# Altium PCB Odrive.PcbDoc (part 1 of 4)
Units mil, origin at the board's own origin, x right, y up, seen from the top; angles counter-clockwise.
Board outline 2874.02 x 1968.5 mil, 4 copper layers (Top Layer, Power, Signal, Bottom Layer), stack 74.892 mil thick; 198 components, 162 nets, 717 pads, 948 vias.
Unrouted connection lines stored in the file: 81.
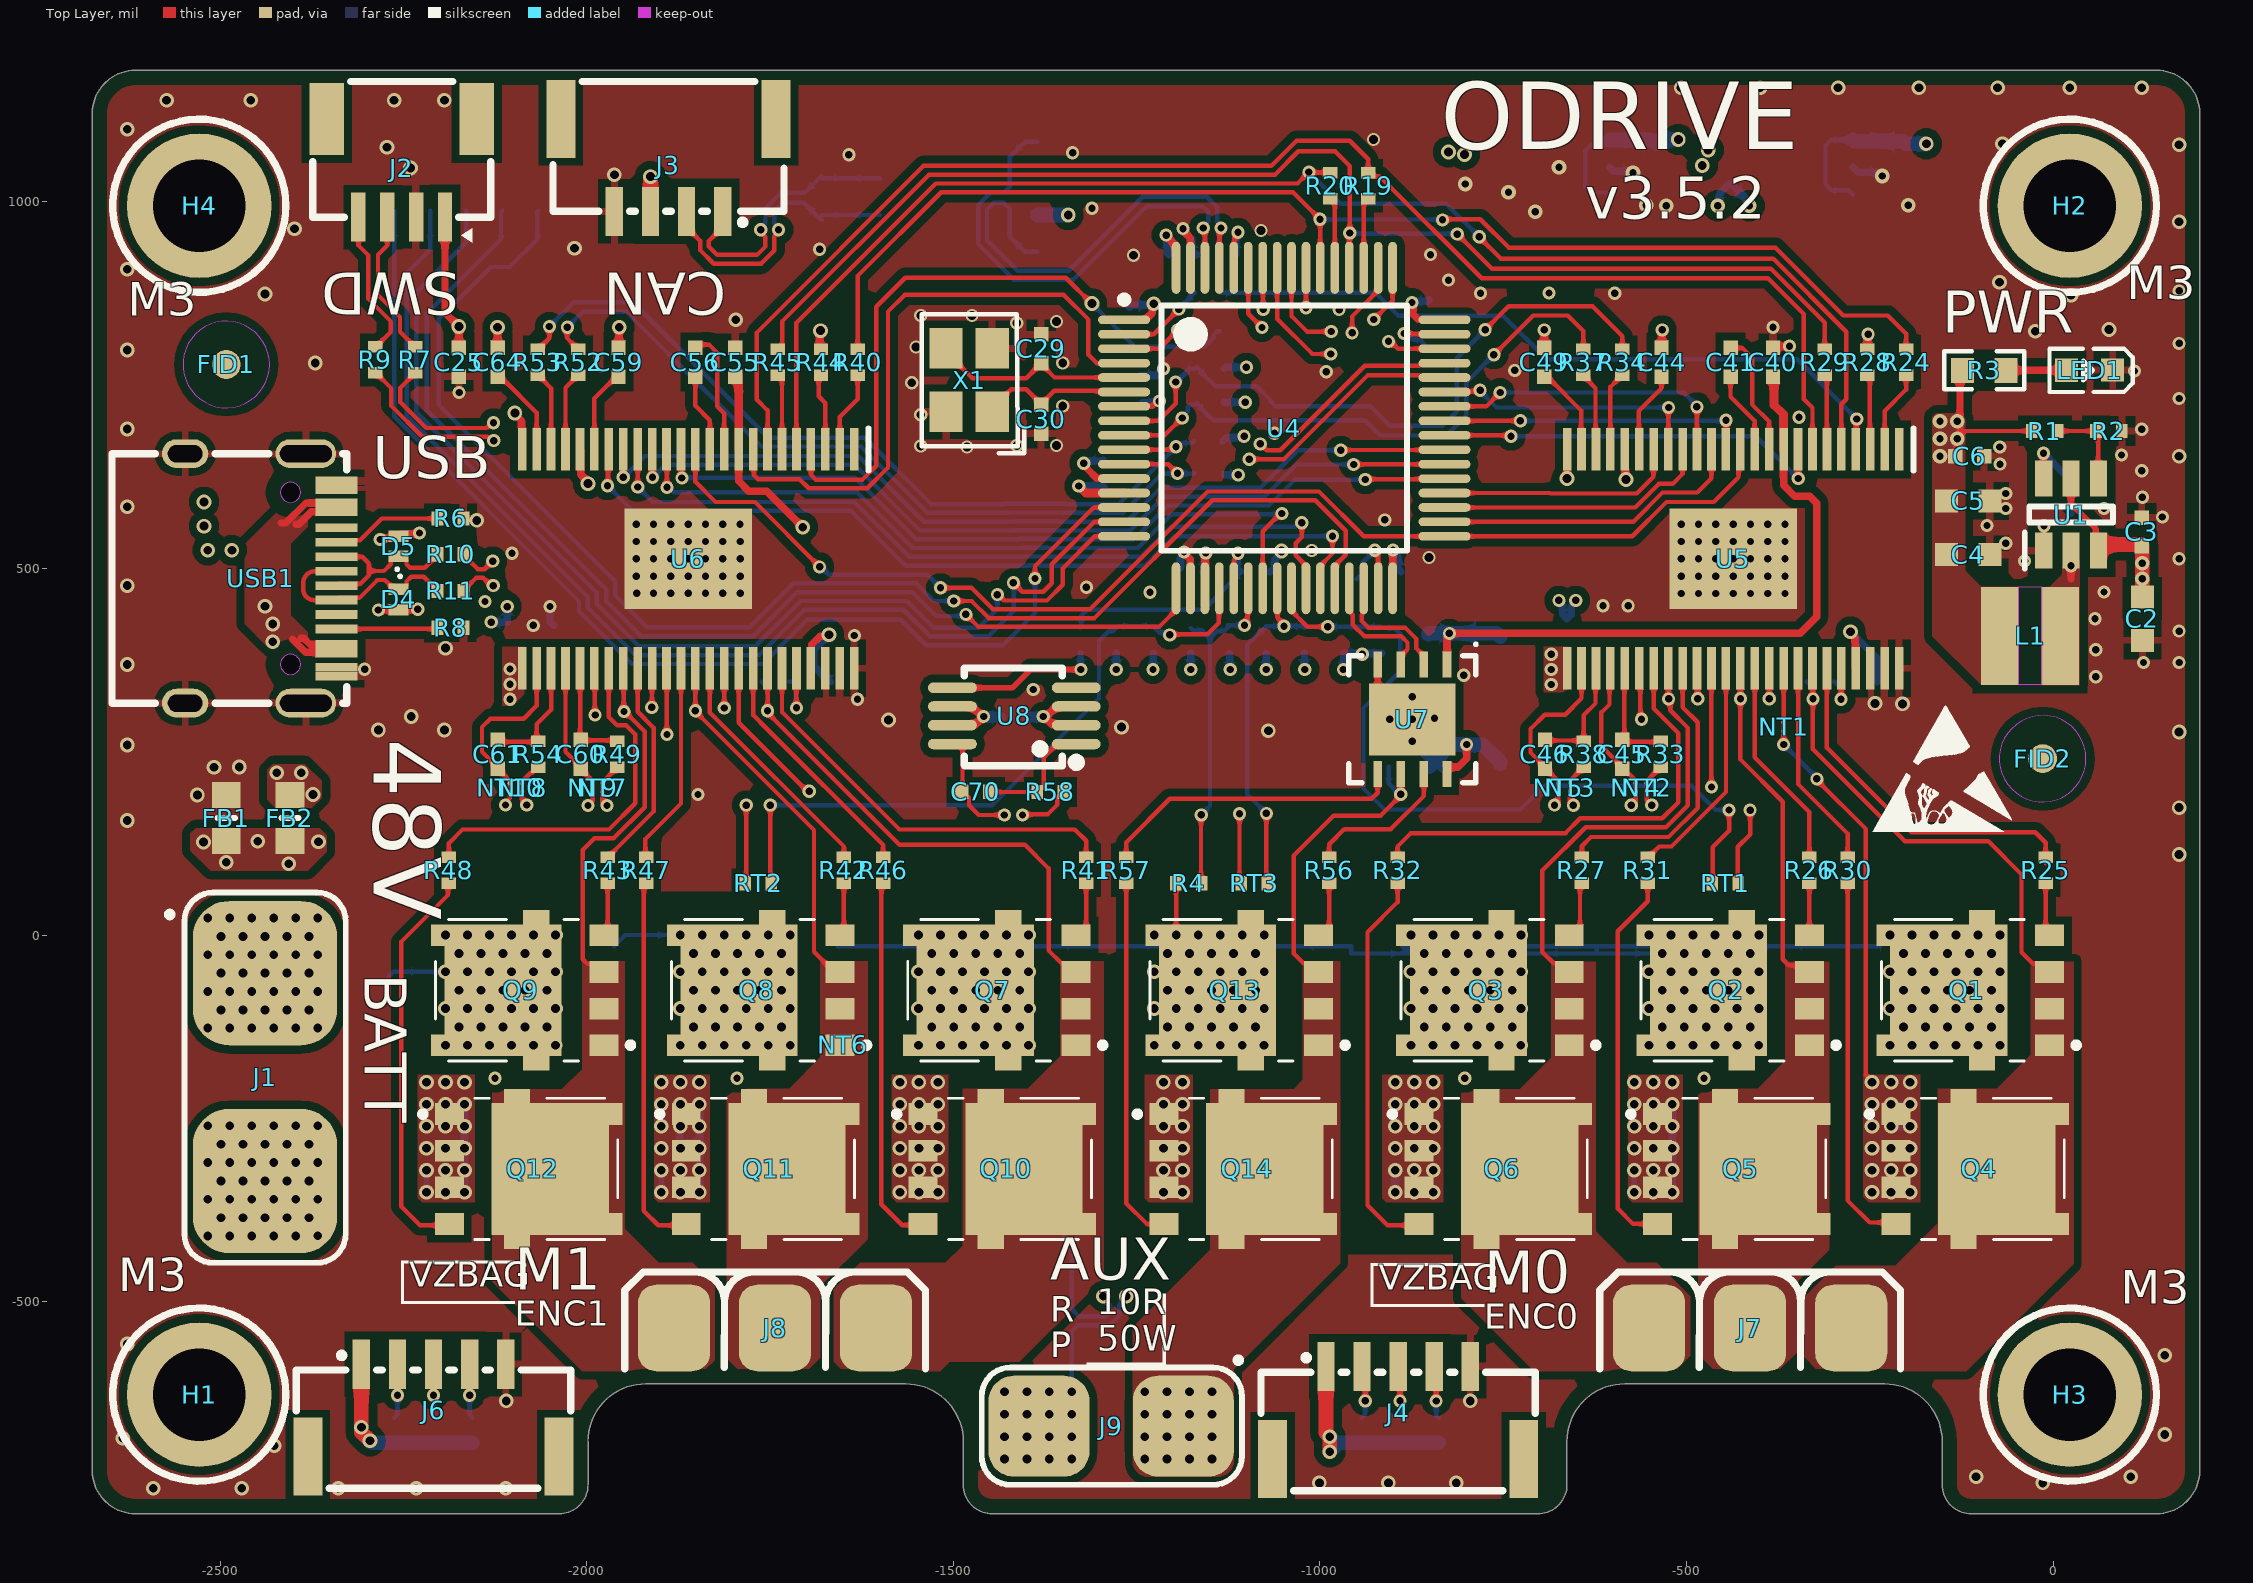
[diagram p0: Top Layer view]
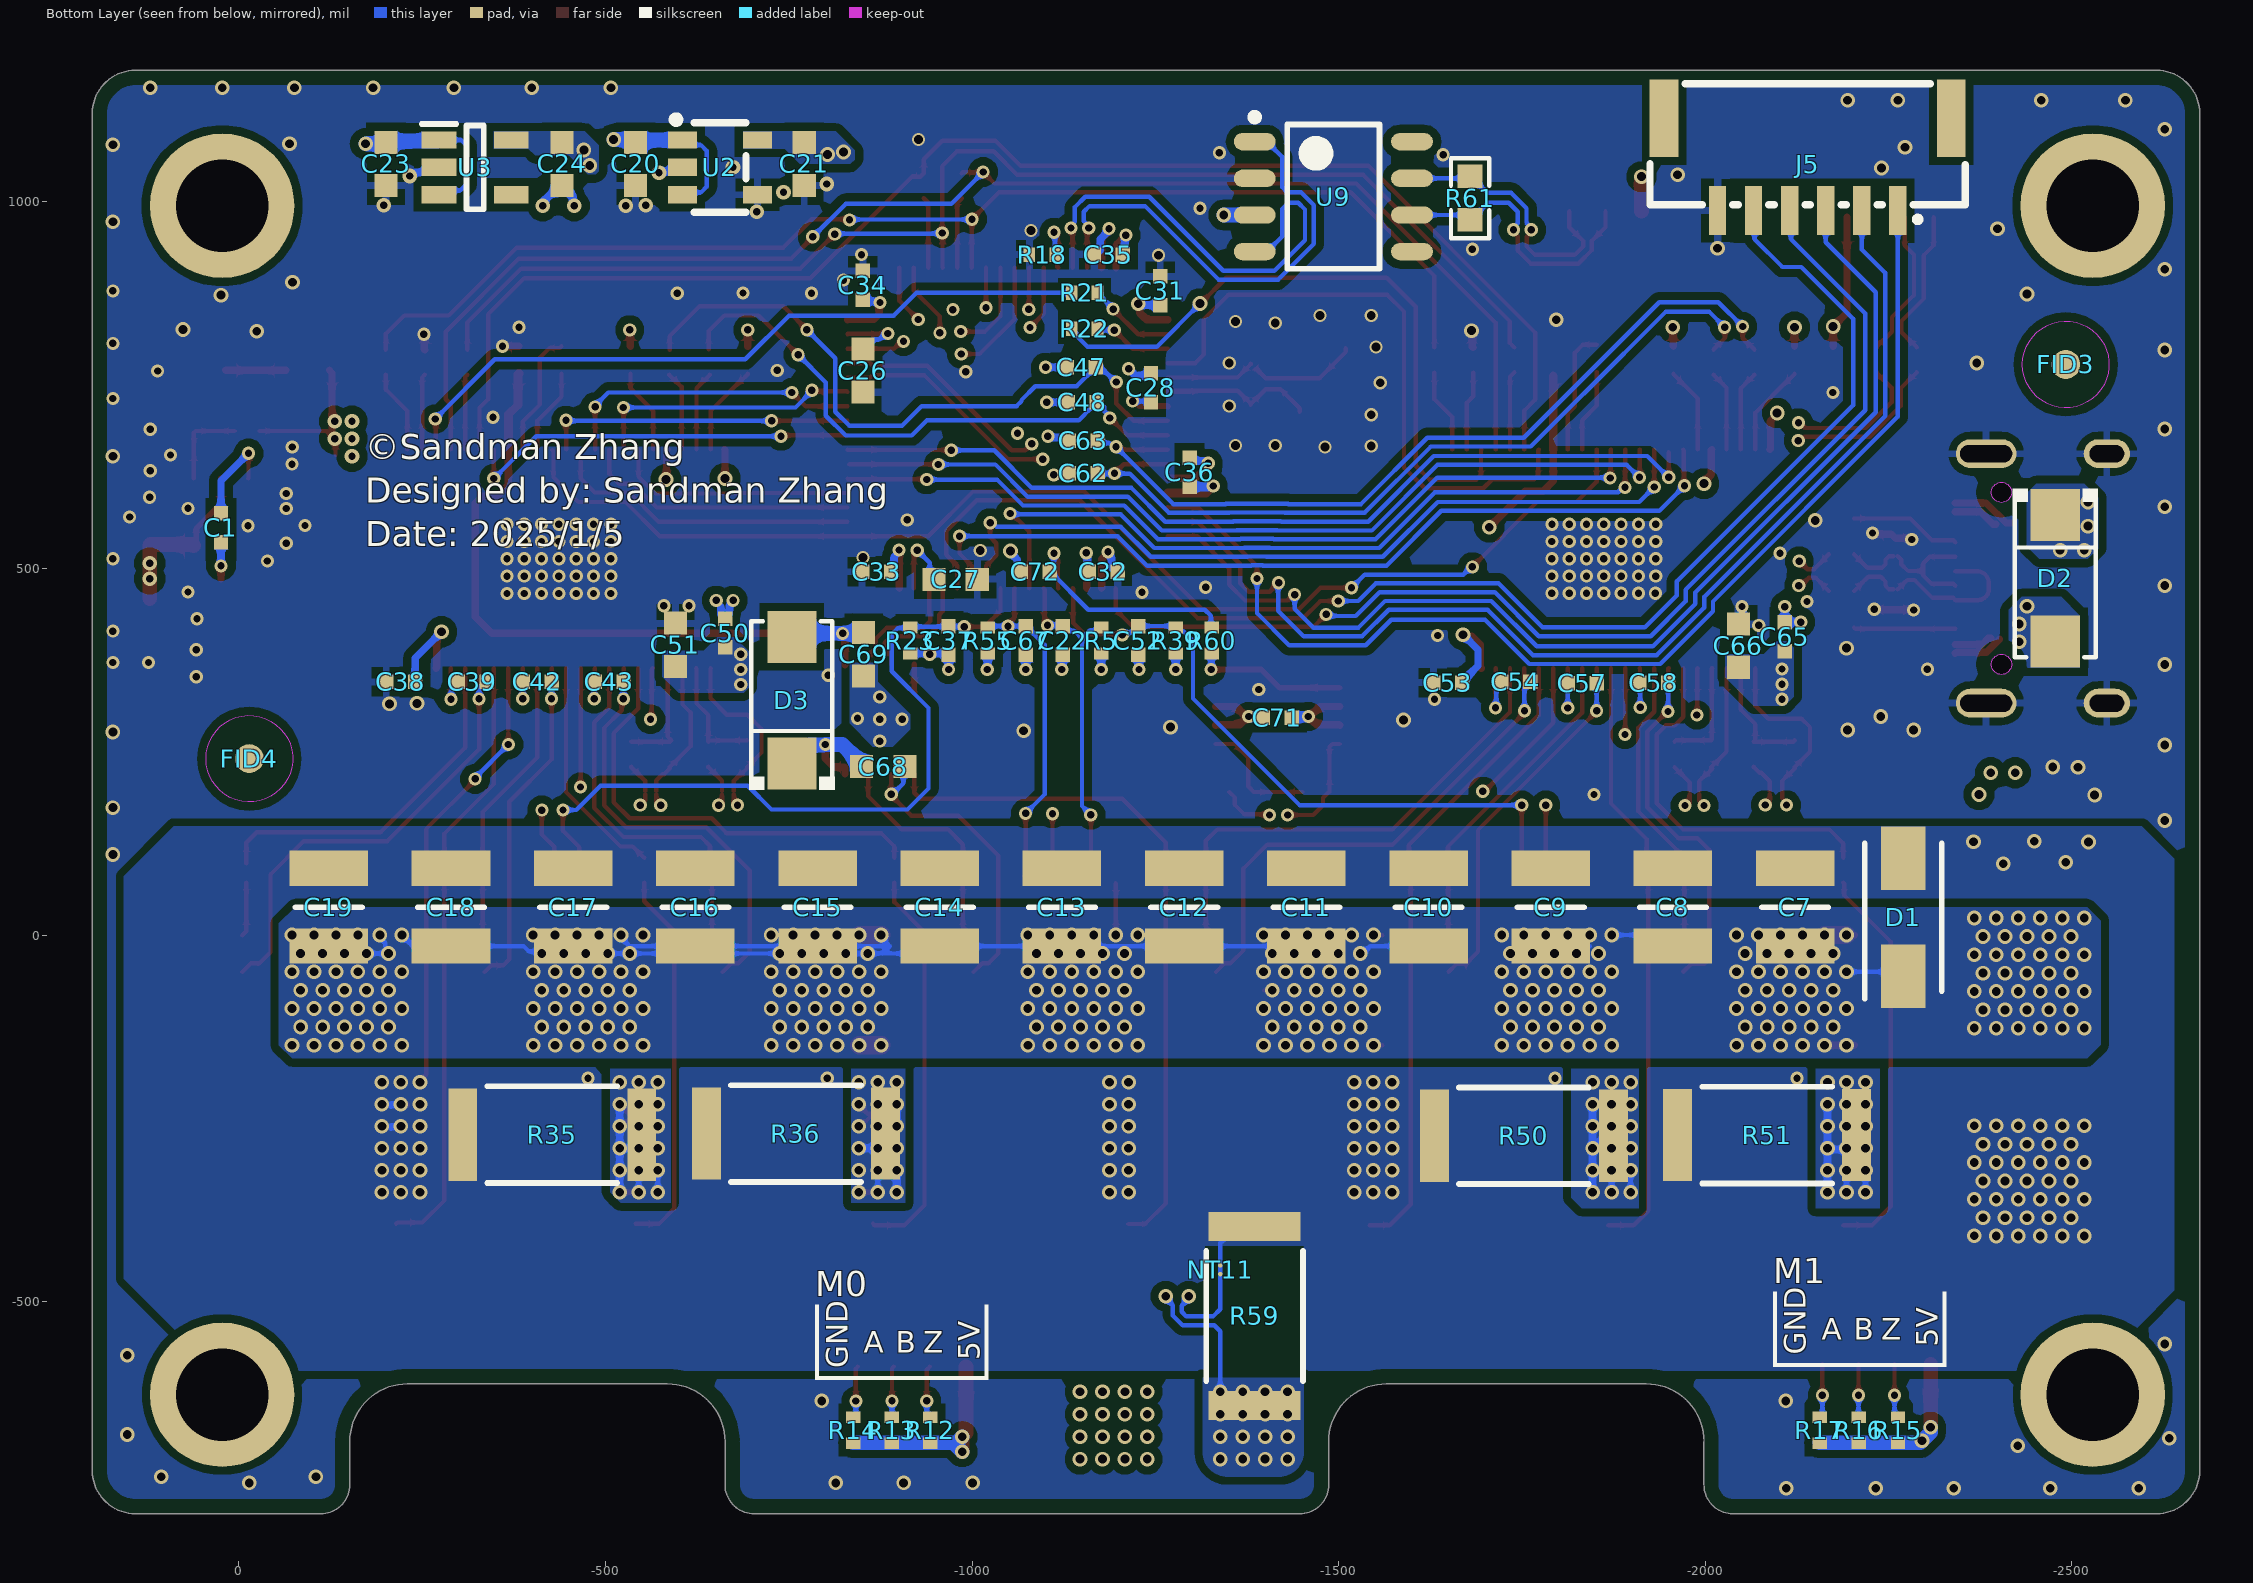
[diagram p1: Bottom Layer view, seen from below]
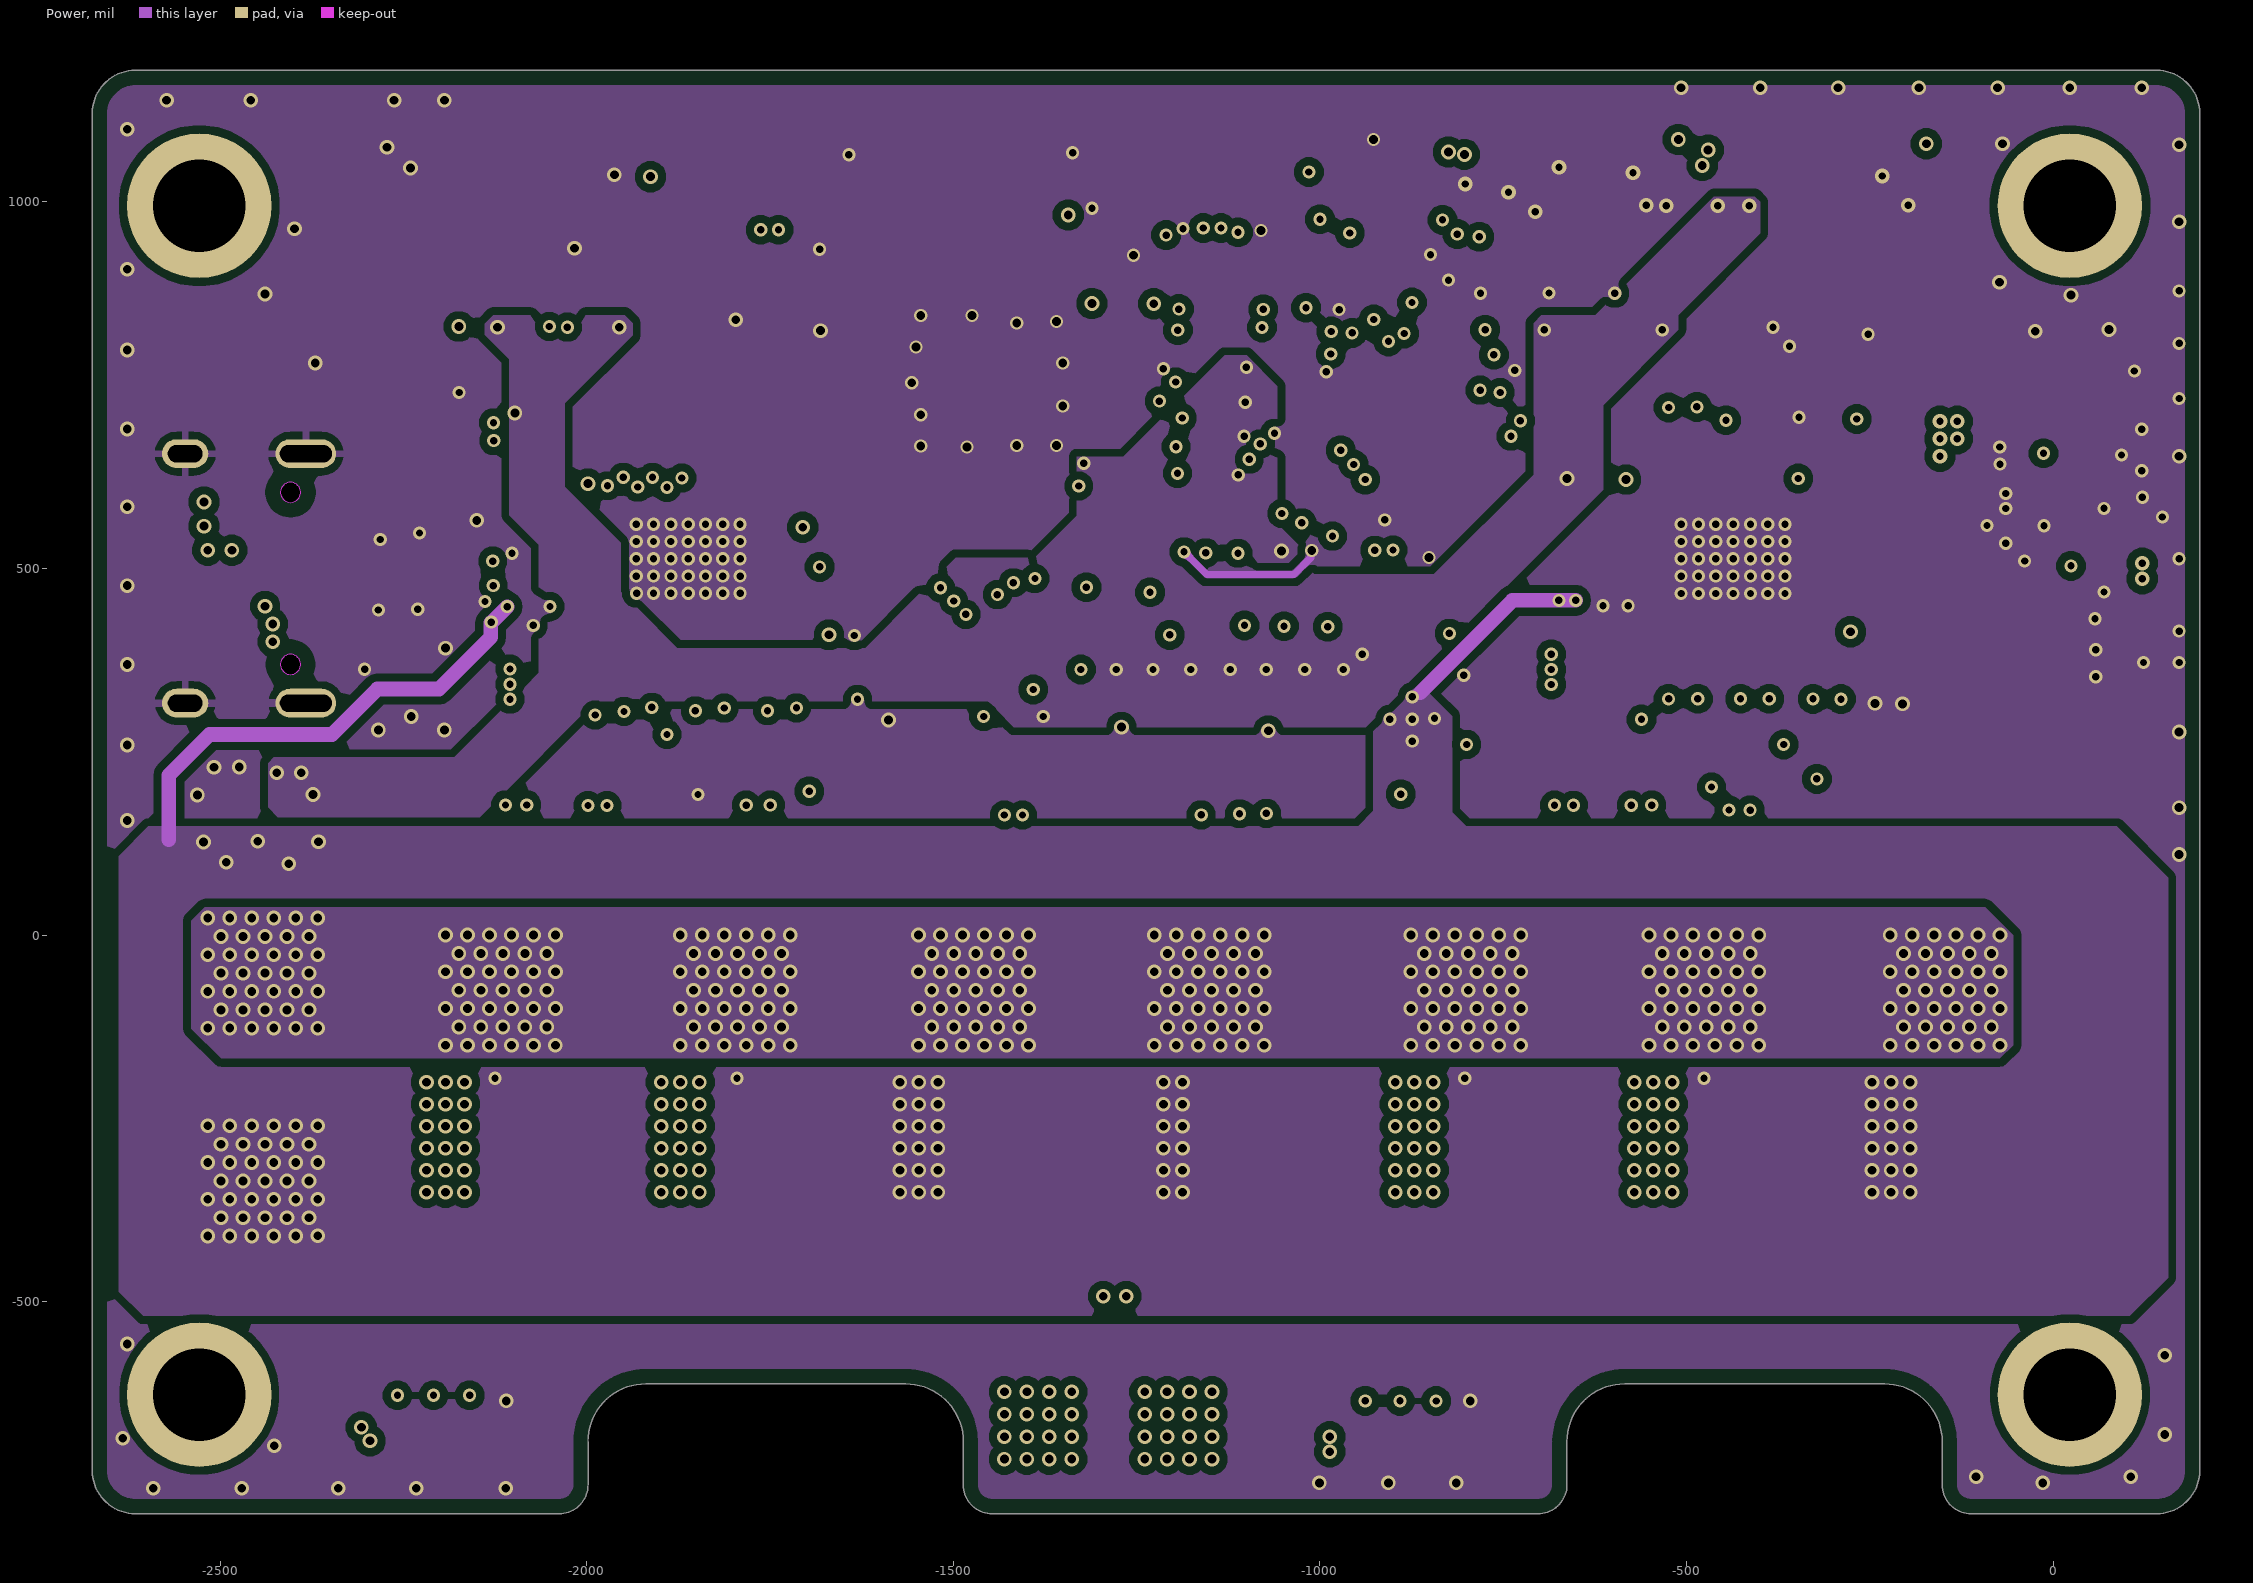
[diagram p2: Power]
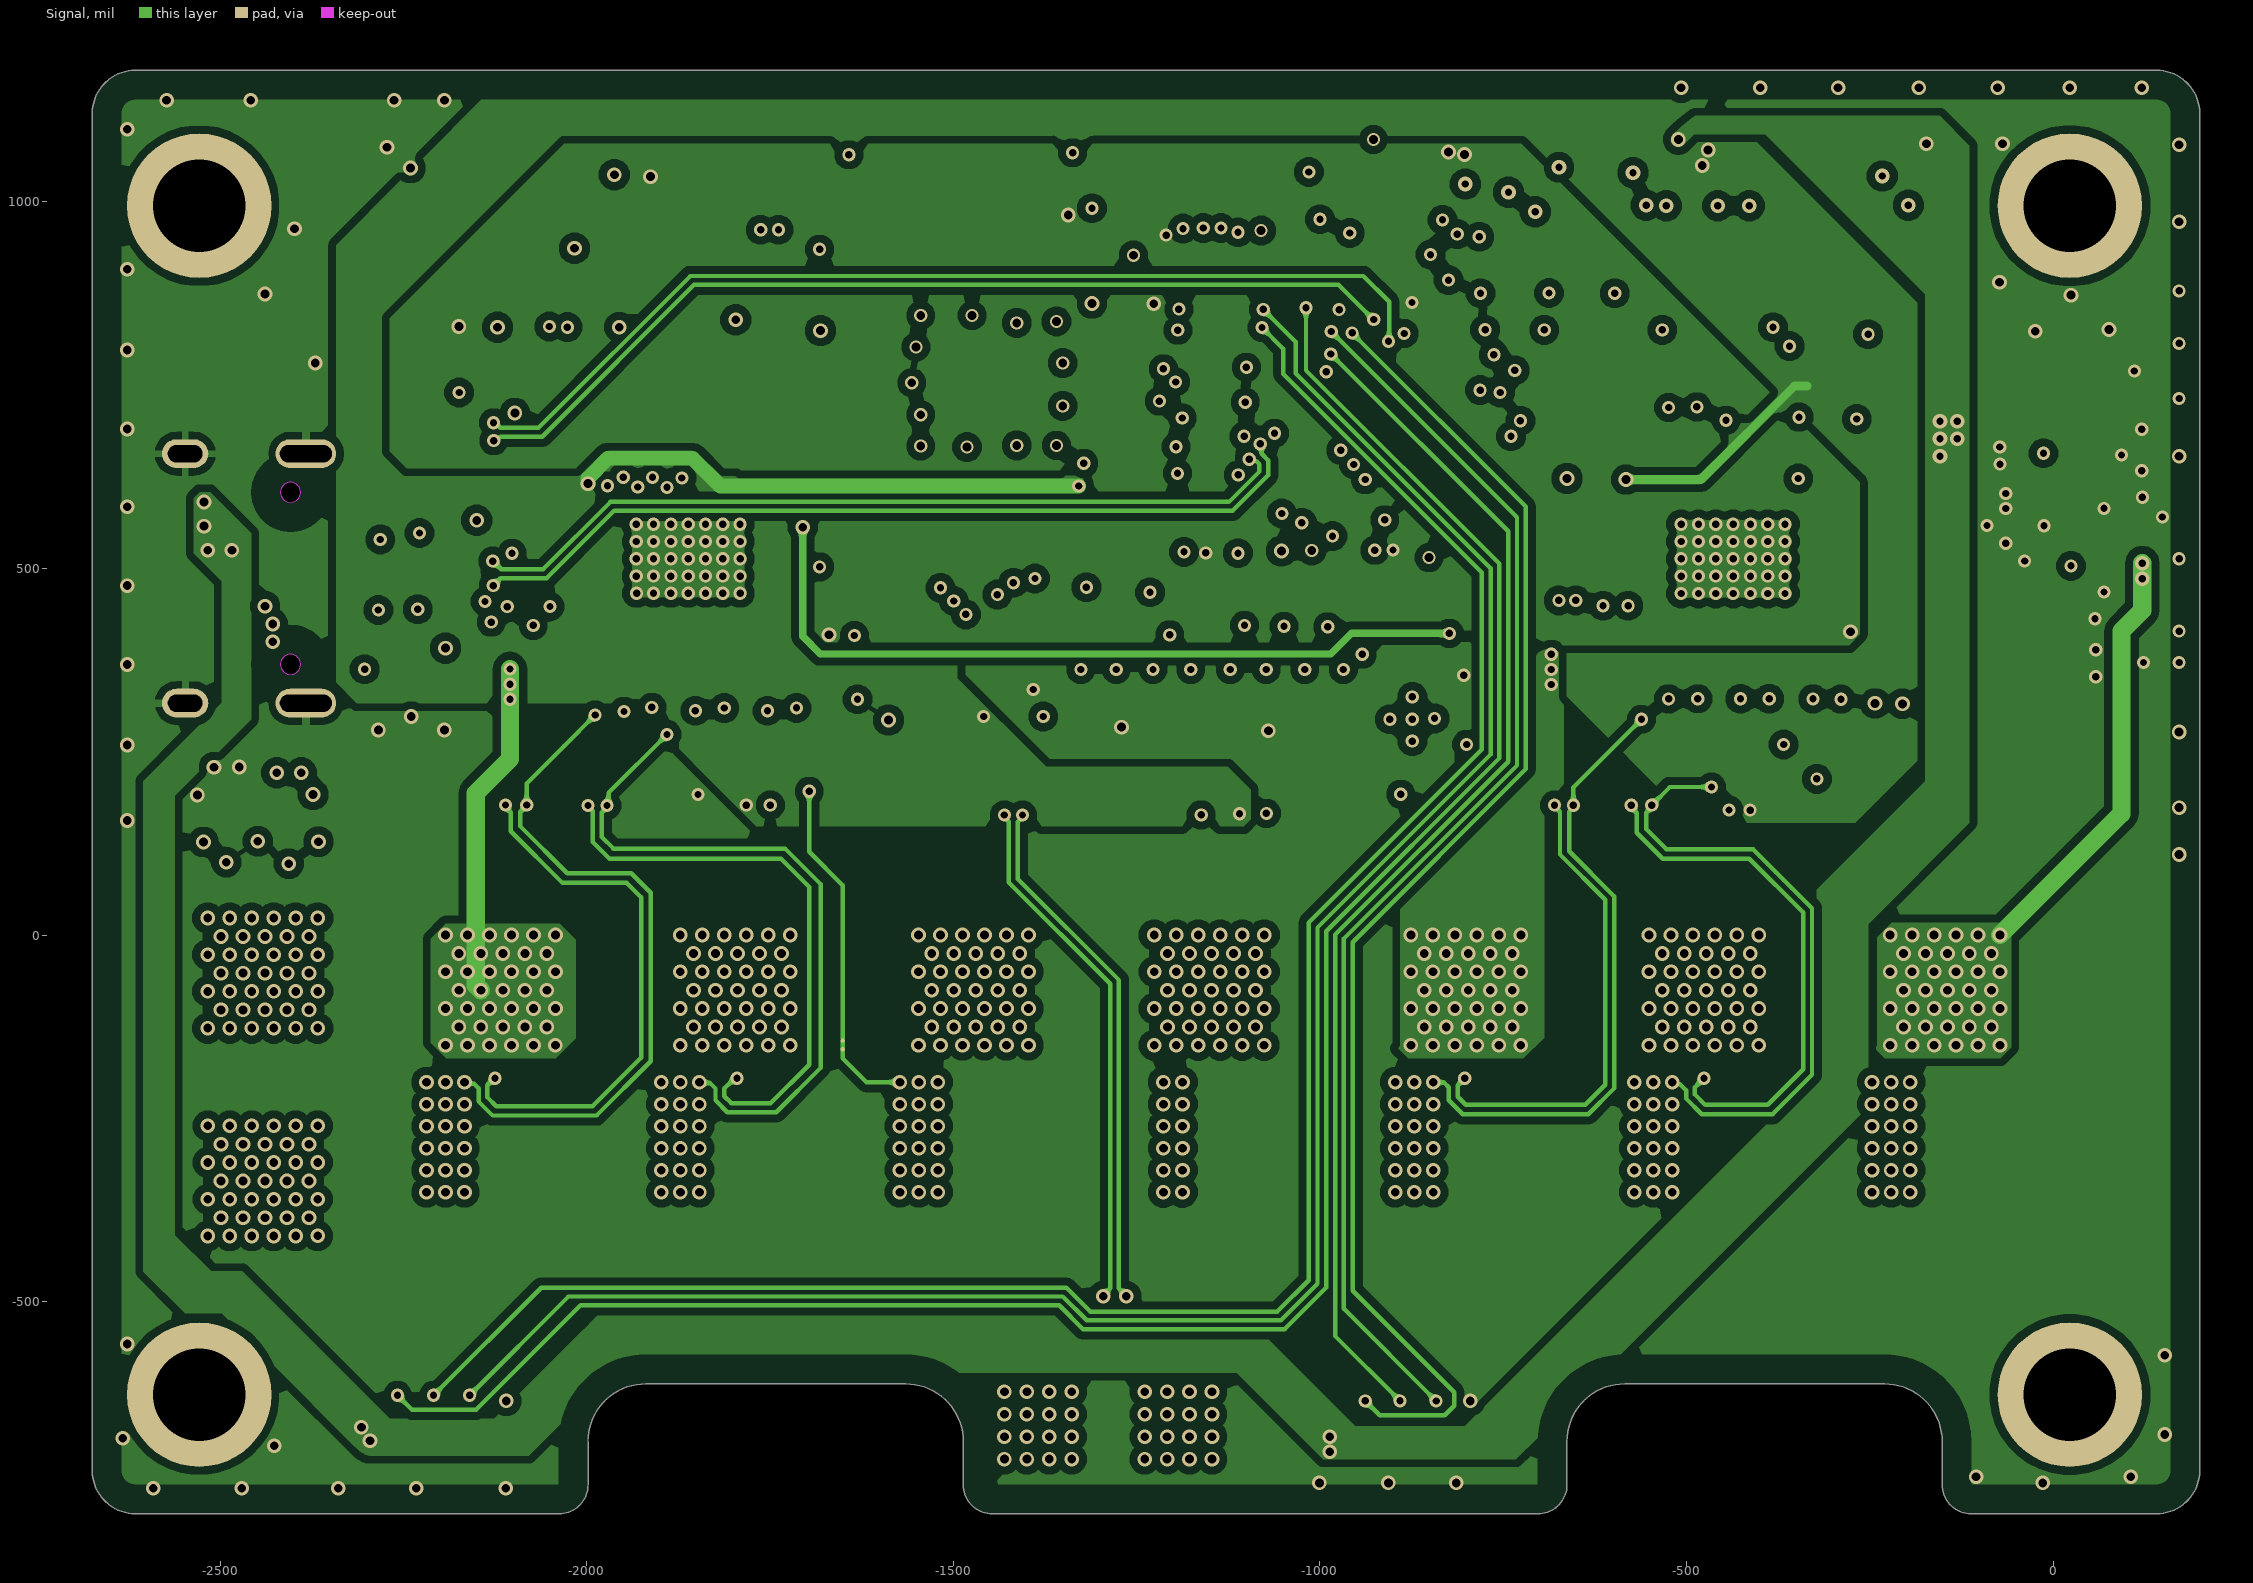
[diagram p3: Signal]
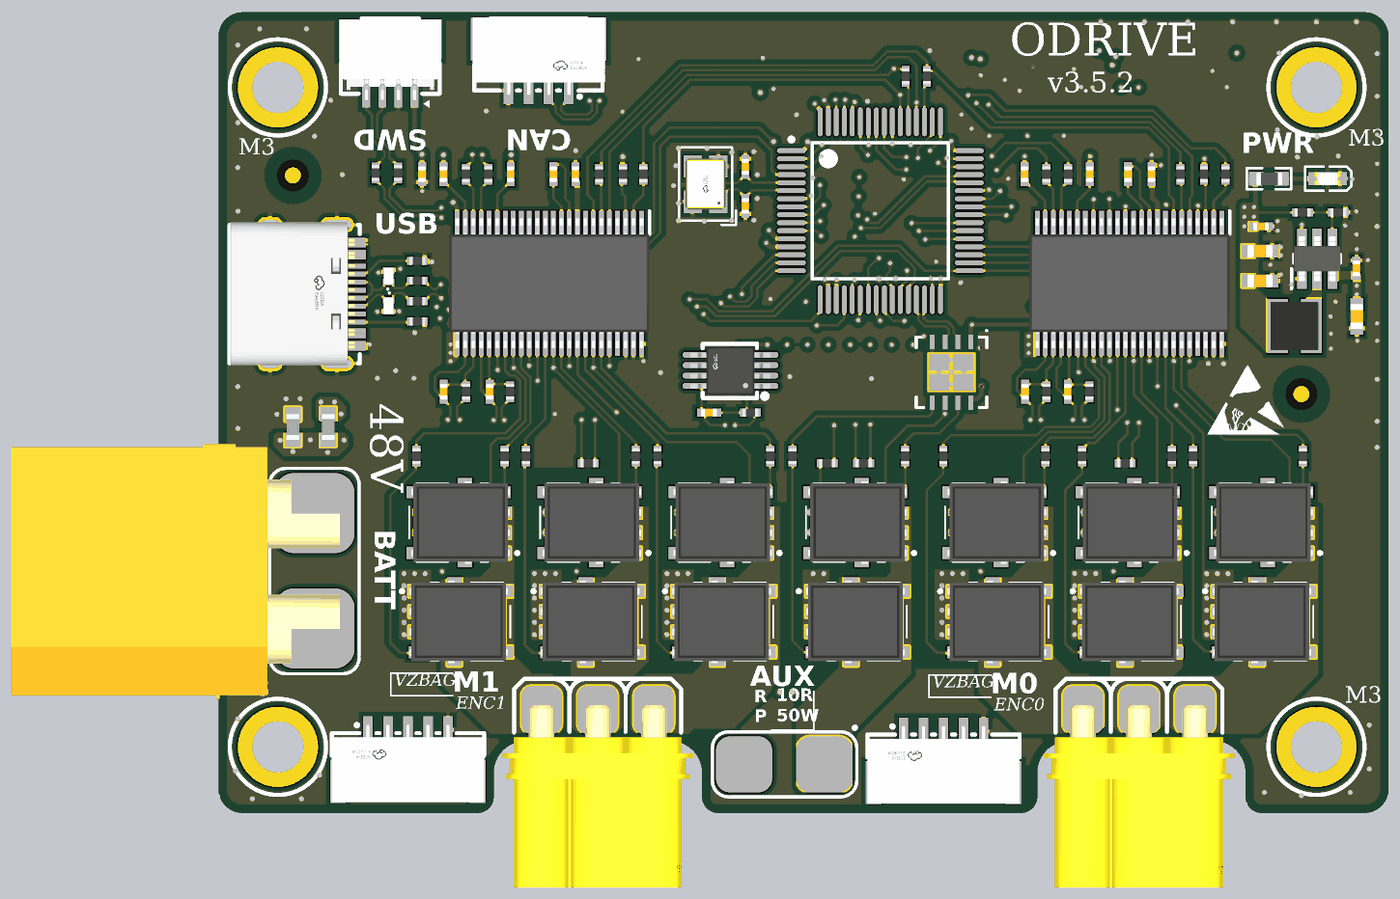
[diagram p6: 3D render of the assembled board from above, using the file's embedded part models]
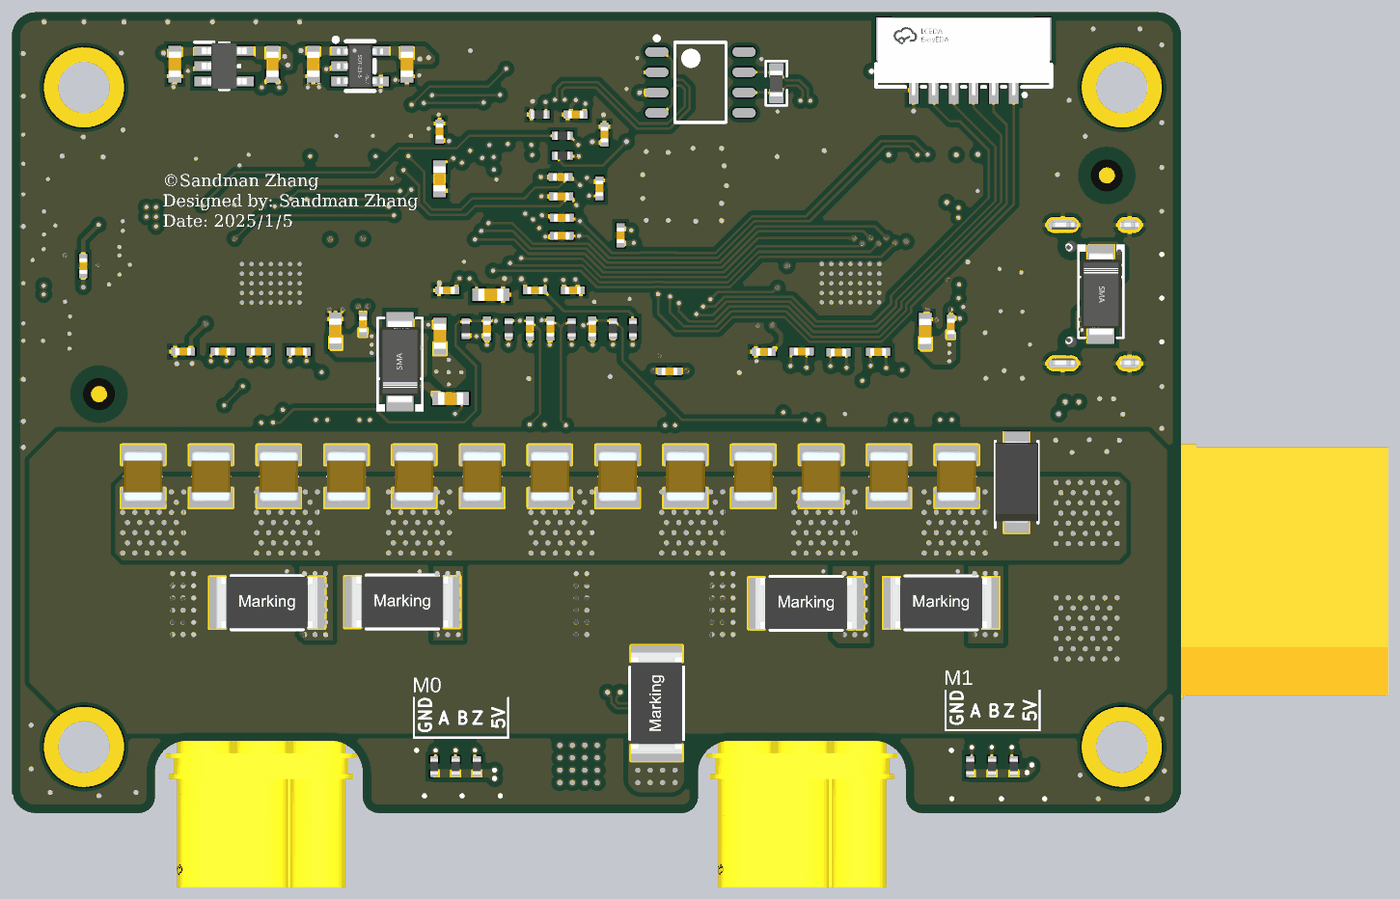
[diagram p7: 3D render of the assembled board from below, using the file's embedded part models]

## Layer stack, top to bottom
Top Solder: solder mask 0.4, Solder Resist, Dk 3.5
Top Layer: signal copper 2.756
Dielectric 1: prepreg 2.8, PP-006, Dk 4.1
Power: signal copper 1.378
Dielectric1: core 61.024, FR-4, Dk 4.8
Signal: signal copper 1.378
Dielectric 2: prepreg 2.8, PP-006, Dk 4.1
Bottom Layer: signal copper 2.756
Bottom Solder: solder mask 0.4, Solder Resist, Dk 3.5

## Board outline
-2615.15,-788.96 -2037.54,-788.96 ccw(c-2037.54,-749.59) -1998.17,-749.59 -1998.17,-690.53 cw(c-1919.43,-690.53) -1919.43,-611.79 -1565.1,-611.79 cw(c-1565.1,-690.53) -1486.36,-690.53 -1486.36,-749.59 ccw(c-1446.99,-749.59) -1446.99,-788.96 -702.54,-788.96 ccw(c-702.54,-749.59) -663.17,-749.59 -663.17,-690.53 cw(c-584.43,-690.53) -584.43,-611.79 -230.1,-611.79 cw(c-230.1,-690.53) -151.36,-690.53 -151.36,-749.59 ccw(c-111.98,-749.59) -111.98,-788.96 140.75,-788.96 ccw(c140.75,-729.91) 199.81,-729.91 199.81,1120.49 ccw(c140.75,1120.49) 140.75,1179.54 -2615.15,1179.54 ccw(c-2615.15,1120.49) -2674.21,1120.49 -2674.21,-729.91 ccw(c-2615.15,-729.91)

## Design rules (kind name [scope] priority, off if disabled: settings)
AcuteAngle [All] p1: minimum=3.00000000000000E+0001 checktracksonly=FALSE
BoardOutlineClearance BoardOutlineClearance_Power [OnLayer('Signal')] p1: gap=40 ignorepadtopadclearanceinfootprint=FALSE
BoardOutlineClearance [All] p2: gap=20 ignorepadtopadclearanceinfootprint=FALSE
Clearance Clearance_NETTIE [InComponentClass('Nettie')] p1: gap=0 ignorepadtopadclearanceinfootprint=TRUE
Clearance [All] p2: gap=6 ignorepadtopadclearanceinfootprint=TRUE
ComponentClearance [All] p1: gap=-3937.01 collisioncheckmode=3 verticalgap=100000 showdistances=FALSE
Creepage [All] p1: checkdistance=10 applytopolygonpour=TRUE
DiffPairsRouting DiffPair_DiffPairsRouting [InDifferentialPair ('CAN_MCU')] p1: maxlimit=20 minlimit=6 mostfreqgap=6 toplayer_minwidth=6 toplayer_maxwidth=20 toplayer_prefwidth=6 midlayer1_minwidth=6 midlayer1_maxwidth=20 midlayer1_prefwidth=6 midlayer2_minwidth=6 midlayer2_maxwidth=20 midlayer2_prefwidth=6 bottomlayer_minwidth=6 bottomlayer_maxwidth=20 bottomlayer_prefwidth=6 maxuncoupledlength=500
FanoutControl Fanout_LCC [IsLCC] p1: bgadir=Out bgaviamode=Centered fanoutstyle=Auto fanoutdirection=Alternating viagrid=1 // Fanout_LCC (Default Rule)
FanoutControl Fanout_SOIC [IsSOIC] p2: bgadir=Out bgaviamode=Centered fanoutstyle=Auto fanoutdirection=Alternating viagrid=1 // Fanout_SOIC (Default Rule)
FanoutControl Fanout_Small [(CompPinCount < 5)] p3: bgadir=Out bgaviamode=Centered fanoutstyle=Auto fanoutdirection=OutThenIn viagrid=1 // Fanout_Small (Default Rule)
FanoutControl Fanout_Default [All] p4: bgadir=Out bgaviamode=Centered fanoutstyle=Auto fanoutdirection=Alternating viagrid=1 // Fanout_Default (Default Rule)
HoleSize [All] p1: absolutevalues=TRUE maxlimit=250 minlimit=6 maxpercent=80.000 minpercent=20.000
HoleToHoleClearance [All] p1: gap=8 allowstackedmicrovias=TRUE
Length [All] p1: maxlimit=100000 minlimit=0
MatchedLengths DiffPair_MatchedLengths [InDifferentialPair ('CAN_MCU')] p1: tolerance=1000 checknetsindiffpair=FALSE checkdiffpairvsdiffpair=TRUE checkxsignals=TRUE checkothers=TRUE
MinimumAnnularRing [All] p1: minimumring=3
MinimumSolderMaskSliver MinimumSolderMaskSliver_USB [HasFootprint('USB-C-16P')] p1: minsoldermaskwidth=1
MinimumSolderMaskSliver MinimumSolderMaskSliver_Comp [HasFootprint('MSOP-8_L3.0-W3.0-P0.65-LS5.0-BL')] p2: minsoldermaskwidth=1
MinimumSolderMaskSliver MinimumSolderMaskSliver_NETTIE [HasFootprint('NETTIE_8MIL')] p3: minsoldermaskwidth=0
MinimumSolderMaskSliver MinimumSolderMaskSliver_RP [HasFootprint('RES-ARRAY-SMD_0603-8P-L3.2-W1.6-BL')] p4: minsoldermaskwidth=0.5
MinimumSolderMaskSliver MinimumSolderMaskSliver_RP_1 [HasFootprint('ZQFN-4L_L1.0-W1.0-P0.63-BL-EP')] p5: minsoldermaskwidth=0
MinimumSolderMaskSliver MinimumSolderMaskSliver_LDO [HasFootprint('SOT-23-5_L3.0-W1.7-P0.95-LS2.8-BR')] p6: minsoldermaskwidth=2
MinimumSolderMaskSliver [All] p7: minsoldermaskwidth=5.7
PasteMaskExpansion [All] p1: expansion=0 thpadusetoppaste=TRUE thpadusebottompaste=TRUE
PermittedLayers [All] p1: toplayerpermitted=TRUE bottomlayerpermitted=TRUE
PlaneConnect [All] p1: planeconnectstyle=Direct reliefexpansion=20 reliefentries=4 reliefconductorwidth=10 reliefairgap=10
PolygonConnect PolygonConnect_GND [IsPad vs InNet('GND')] p1: connectstyle=Relief reliefconductorwidth=10 reliefentries=4 polygonreliefangle="90 Angle" airgapwidth=10
PolygonConnect [All] p2: connectstyle=Direct reliefconductorwidth=10 reliefentries=4 polygonreliefangle="90 Angle" airgapwidth=10
RoutingPriority RoutingPriority_Power [InNet('3V3')] p1: routingpriority=5
RoutingPriority RoutingPriority_Power_1 [InNet('A3V3')] p2: routingpriority=4
RoutingPriority RoutingPriority_Power_2 [InNet('DCBUS')] p3: routingpriority=3
RoutingPriority [All] p4: routingpriority=0
RoutingVias [All] p1: holewidth=12 width=20 viastyle="Through Hole" minholewidth=8 minwidth=10 maxholewidth=80 maxwidth=160
SilkToSilkClearance [All] p1: silktosilkclearance=0
SilkToSolderMaskClearance [IsPad] p1: minsilkscreentomaskgap=0 clearancetoexposedcopper=FALSE
SolderMaskExpansion SolderMaskExpansion_footprint [InPadClass('All Pads')] p1: expansion=4 istentingtop=FALSE
SolderMaskExpansion [All] p2: expansion=4 istentingtop=TRUE
SupplyNets "Schematic Supply Nets_3" [InNet('VCC16V8_BAT')] p1: voltage=0.000
SupplyNets "Schematic Supply Nets_12" [InNet('VCC3V3_ASYS')] p2: voltage=0.000
SupplyNets "Schematic Supply Nets_10" [InNet('VCC3V3_SYS')] p3: voltage=0.000
SupplyNets "Schematic Supply Nets_9" [InNet('VCC5V0_SYS')] p4: voltage=0.000
SupplyNets "Schematic Supply Nets_7" [InNet('AGND')] p5: voltage=0.000
SupplyNets "Schematic Supply Nets_6" [InNet('PGND')] p6: voltage=0.000
SupplyNets "Schematic Supply Nets_4" [InNet('GND')] p7: voltage=0.000
SupplyNets "Schematic Supply Nets_2" [InNet('GVDD')] p8: voltage=0.000
SupplyNets "Schematic Supply Nets_1" [InNet('USB_5V')] p9: voltage=0.000
UnConnectedPin [InNet('GND')] p1:
UnRoutedNet UnRoutedNet_NETTIE [IsNetTieComponent] p1: checkbadconnections=TRUE
UnRoutedNet [All] p2: checkbadconnections=TRUE
Width Width_MOS [InComponent('U6')] p1: maxlimit=16 minlimit=8 preferedwidth=10 checkconnectedcopper=TRUE
Width Width_Driver [InComponent('U4') And InComponent('U5')] p2: maxlimit=16 minlimit=6 preferedwidth=8 checkconnectedcopper=TRUE
Width [All] p3: maxlimit=999 minlimit=6 preferedwidth=6
14 further rules are at their usual default settings.

## Classes and differential pairs
component class Nettie: NT1 NT2 NT3 NT4 NT5 NT6 NT7 NT8 NT9 NT10 NT11
component class "Components Class2": C2 C4 C24 C28 C43 C47 C52 C66 C67 C71 R5 R6 R28 R37 R38 R46 R60
component class "Components Class1": C2 C8 C10 C12 C20 C24 C37 C47 C60 C63 C66 R1 R5 R9 R26 R40 R52 R60 U6
component class "Room Definition4": C2 C10 C20 C24 C47 C60 C63 C66 R1 R5 R9 R26 R52 R60 U6
component class "Room Definition3": C2 C10 C20 C24 C60 C66 R1 R5 R9 R26 R40 R52 R60 U6
component class "Room Definition2": C2 C47
component class "Room Definition1": C2 C10 C20 C24 C47 C60 C63 C66 R1 R5 R9 R26 R40 R52 R60 U6
component class U_Others: FID1 FID2 FID3 FID4 H1 H2 H3 H4
component class Designator: R61 U9
net class GPIO_[1..5]: GPIO_1 GPIO_2 GPIO_3 GPIO_4 GPIO_5
component class U_Port: C25 D2 D4 D5 J2 J3 J4 J5 J6 R6 R7 R8 R9 R10 R11 R12 R13 R14 R15 R16 R17 USB1
component class U_Power: C1 C2 C3 C4 C5 C6 C7 C8 C9 C10 C11 C12 C13 C14 C15 C16 C17 C18 C19 C20 C21 C22 C23 C24 D1 FB1 FB2 J1 L1 LED1 R1 R2 R3 R4 R5 U1 U2 U3
component class U_Control: C26 C27 C28 C29 C30 C31 C32 C33 C34 C35 C36 R18 R19 R20 R21 R22 U4 X1
component class U_MotorCell_noPow: C52 C53 C54 C55 C56 C57 C58 C59 C60 C61 C62 C63 C64 C65 C66 J8 NT6 NT7 NT8 NT9 NT10 Q7 Q8 Q9 Q10 Q11 Q12 R39 R40 R41 R42 R43 R44 R45 R46 R47 R48 R49 R50 R51 R52 R53 R54 RT2 U6
component class U_MotorCell: C37 C38 C39 C40 C41 C42 C43 C44 C45 C46 C47 C48 C49 C50 C51 J7 NT1 NT2 NT3 NT4 NT5 Q1 Q2 Q3 Q4 Q5 Q6 R23 R24 R25 R26 R27 R28 R29 R30 R31 R32 R33 R34 R35 R36 R37 R38 RT1 U5
component class U_AuxHalfH: C67 C68 C69 C70 C71 C72 D3 J9 NT11 Q13 Q14 R55 R56 R57 R58 R59 R60 RT3 U7 U8
differential pair CAN: +CAN_P -CAN_N
differential pair CAN_MCU: +CAN_MCU_P -CAN_MCU_N
differential pair USB: +USB_P -USB_N
differential pair SENSE: +SENSE_P -SENSE_N

## Components (designator, comment, footprint, x,y, rotation, side; value= is the part's Value field where it differs from the comment)
C1 "100nF ±5%_X7R" WCAP-CSGP_0402_L1W0.5H0.5 24.3,555.64 r90 bottom
C2 "2.2uF ±5%_X7R" WCAP-CSGP_0603_L1.6W0.8H0.8_Reflow 121.61,431.69 r90 top
C3 "100nF ±5%_X7R" WCAP-CSGP_0402_L1W0.5H0.5 120.78,549.88 r270 top
C4 "10uF ±5%_X7R" WCAP-CSGP_0603_L1.6W0.8H0.8_Reflow -115.88,519.03 r180 top
C5 "10uF ±5%_X7R" WCAP-CSGP_0603_L1.6W0.8H0.8_Reflow -115.88,592.28 r180 top
C6 "100nF ±5%_X7R" WCAP-CSGP_0402_L1W0.5H0.5 -113.62,653.22 r180 top
C7 "22uF ±10% 25V" CAPC3225X270N -2122.47,38.27 r270 bottom
C8 "22uF ±10% 25V" CAPC3225X270N -1955.83,38.27 r270 bottom
C9 "22uF ±10% 25V" CAPC3225X270N -1789.18,38.27 r270 bottom
C10 "22uF ±10% 25V" CAPC3225X270N -1622.54,38.27 r270 bottom
C11 "22uF ±10% 25V" CAPC3225X270N -1455.9,38.27 r270 bottom
C12 "22uF ±10% 25V" CAPC3225X270N -1289.26,38.27 r270 bottom
C13 "22uF ±10% 25V" CAPC3225X270N -1122.61,38.27 r270 bottom
C14 "22uF ±10% 25V" CAPC3225X270N -955.97,38.27 r270 bottom
C15 "22uF ±10% 25V" CAPC3225X270N -789.33,38.27 r270 bottom
C16 "22uF ±10% 25V" CAPC3225X270N -622.69,38.27 r270 bottom
C17 "22uF ±10% 25V" CAPC3225X270N -456.04,38.27 r270 bottom
C18 "22uF ±10% 25V" CAPC3225X270N -289.4,38.27 r270 bottom
C19 "22uF ±10% 25V" CAPC3225X270N -122.76,38.27 r270 bottom
C20 "10uF ±5%_X7R" WCAP-CSGP_0603_L1.6W0.8H0.8_Reflow -541.19,1051.73 r90 bottom
C21 "10uF ±5%_X7R" WCAP-CSGP_0603_L1.6W0.8H0.8_Reflow -771.19,1051.73 r90 bottom
C22 "2.2uF ±5%_X7R" WCAP-CSGP_0402_L1W0.5H0.5 -1123.78,401.9 r90 bottom
C23 "1uF ±5%_X7R" WCAP-CSGP_0603_L1.6W0.8H0.8_Reflow -200.88,1051.73 r90 bottom
C24 "1uF ±5%_X7R" WCAP-CSGP_0603_L1.6W0.8H0.8_Reflow -440.88,1051.73 r90 bottom
C25 "100nF ±5%_X7R" WCAP-CSGP_0402_L1W0.5H0.5 -2174.27,781.53 r90 top
C26 "2.2uF ±5%_X7R" WCAP-CSGP_0603_L1.6W0.8H0.8_Reflow -851.18,770.05 r90 bottom
C27 "2.2uF ±5%_X7R" WCAP-CSGP_0603_L1.6W0.8H0.8_Reflow -977.58,485.33 r0 bottom
C28 "100nF ±5%_X7R" WCAP-CSGP_0402_L1W0.5H0.5 -1244,746.68 r270 bottom
C29 "10pF ±5%_X7R" WCAP-CSGP_0402_L1W0.5H0.5 -1380.26,799.83 r90 top
C30 "10pF ±5%_X7R" WCAP-CSGP_0402_L1W0.5H0.5 -1380.26,703.63 r270 top
C31 "100nF ±5%_X7R" WCAP-CSGP_0402_L1W0.5H0.5 -1256.58,878.89 r270 bottom
C32 "100nF ±5%_X7R" WCAP-CSGP_0402_L1W0.5H0.5 -1179.06,495.65 r0 bottom
C33 "100nF ±5%_X7R" WCAP-CSGP_0402_L1W0.5H0.5 -869.74,495.65 r180 bottom
C34 "100nF ±5%_X7R" WCAP-CSGP_0402_L1W0.5H0.5 -851.18,886.42 r270 bottom
C35 "100nF ±5%_X7R" WCAP-CSGP_0402_L1W0.5H0.5 -1185.9,928.13 r180 bottom
C36 "100nF ±5%_X7R" WCAP-CSGP_0402_L1W0.5H0.5 -1296.56,631.15 r270 bottom
C37 "2.2uF ±5%_X7R" WCAP-CSGP_0402_L1W0.5H0.5 -967.89,401.9 r90 bottom
C38 "100nF ±5%_X7R" WCAP-CSGP_0402_L1W0.5H0.5 -220.88,345.45 r180 bottom
C39 "100nF ±5%_X7R" WCAP-CSGP_0402_L1W0.5H0.5 -318.44,345.46 r0 bottom
C40 "2.2uF ±5%_X7R" WCAP-CSGP_0402_L1W0.5H0.5 -382.14,781.53 r270 top
C41 "22nF ±5%_X7R" WCAP-CSGP_0402_L1W0.5H0.5 -440.04,781.53 r270 top
C42 "100nF ±5%_X7R" WCAP-CSGP_0402_L1W0.5H0.5 -406.9,345.42 r0 bottom
C43 "100nF ±5%_X7R" WCAP-CSGP_0402_L1W0.5H0.5 -505.29,345.46 r0 bottom
C44 "2.2uF ±5%_X7R" WCAP-CSGP_0402_L1W0.5H0.5 -534.14,781.53 r90 top
C45 "2.2nF ±5%_X7R" WCAP-CSGP_0402_L1W0.5H0.5 -587.76,246.67 r90 top
C46 "2.2nF ±5%_X7R" WCAP-CSGP_0402_L1W0.5H0.5 -693.08,246.67 r90 top
C47 "2.2nF ±5%_X7R" WCAP-CSGP_0402_L1W0.5H0.5 -1148.82,774.49 r180 bottom
C48 "2.2nF ±5%_X7R" WCAP-CSGP_0402_L1W0.5H0.5 -1150.36,726.79 r180 bottom
C49 "2.2uF ±5%_X7R" WCAP-CSGP_0402_L1W0.5H0.5 -694.14,781.53 r270 top
C50 "100nF ±5%_X7R" WCAP-CSGP_0402_L1W0.5H0.5 -663.19,412.09 r270 bottom
C51 "4.7uF ±5%_X7R" WCAP-CSGP_0603_L1.6W0.8H0.8_Reflow -595.41,395.99 r270 bottom
C52 "2.2uF ±5%_X7R" WCAP-CSGP_0402_L1W0.5H0.5 -1226.77,401.9 r90 bottom
C53 "100nF ±5%_X7R" WCAP-CSGP_0402_L1W0.5H0.5 -1648.58,344.44 r180 bottom
C54 "100nF ±5%_X7R" WCAP-CSGP_0402_L1W0.5H0.5 -1741.62,345.46 r0 bottom
C55 "2.2uF ±5%_X7R" WCAP-CSGP_0402_L1W0.5H0.5 -1797.39,781.53 r270 top
C56 "22nF ±5%_X7R" WCAP-CSGP_0402_L1W0.5H0.5 -1851.7,781.53 r270 top
C57 "100nF ±5%_X7R" WCAP-CSGP_0402_L1W0.5H0.5 -1832.02,343.49 r0 bottom
C58 "100nF ±5%_X7R" WCAP-CSGP_0402_L1W0.5H0.5 -1929.49,344.45 r0 bottom
C59 "2.2uF ±5%_X7R" WCAP-CSGP_0402_L1W0.5H0.5 -1956.54,781.53 r90 top
C60 "2.2nF ±5%_X7R" WCAP-CSGP_0402_L1W0.5H0.5 -2007.98,246.67 r90 top
C61 "2.2nF ±5%_X7R" WCAP-CSGP_0402_L1W0.5H0.5 -2121.02,246.67 r90 top
C62 "2.2nF ±5%_X7R" WCAP-CSGP_0402_L1W0.5H0.5 -1151.88,629.83 r180 bottom
C63 "2.2nF ±5%_X7R" WCAP-CSGP_0402_L1W0.5H0.5 -1151.88,674.03 r180 bottom
C64 "2.2uF ±5%_X7R" WCAP-CSGP_0402_L1W0.5H0.5 -2121.54,781.53 r270 top
C65 "100nF ±5%_X7R" WCAP-CSGP_0402_L1W0.5H0.5 -2108.27,407.09 r270 bottom
C66 "4.7uF ±5%_X7R" WCAP-CSGP_0603_L1.6W0.8H0.8_Reflow -2045.08,394.99 r270 bottom
C67 "2.2uF ±5%_X7R" WCAP-CSGP_0402_L1W0.5H0.5 -1073.43,401.9 r90 bottom
C68 "100nF ±5%_X7R" WCAP-CSGP_0603_L1.6W0.8H0.8_Reflow -878.76,229.98 r0 bottom
C69 "2.2uF ±5%_X7R" WCAP-CSGP_0603_L1.6W0.8H0.8_Reflow -852.2,383.04 r90 bottom
C70 "2.2uF ±5%_X7R" WCAP-CSGP_0402_L1W0.5H0.5 -1469.4,195.34 r0 top
C71 "100nF ±5%_X7R" WCAP-CSGP_0402_L1W0.5H0.5 -1416.43,296.75 r180 bottom
C72 "2.2uF ±5%_X7R" WCAP-CSGP_0402_L1W0.5H0.5 -1086.15,495.65 r180 bottom
D1 "SMAJ30A-E3_61" DIOM5127X229N -2269.83,24.55 r90 bottom
D2 "B340A-13-F" SMA_L4.4-W2.6-LS5.0-RD -2477.21,486.55 r270 bottom
D3 "B340A-13-F" SMA_L4.4-W2.6-LS5.0-RD -754.28,320.56 r90 bottom
D4 "PESD5V0F1BL,315" PESD5V0S1BL315 -2256.42,457.82 r270 top
D5 "PESD5V0F1BL,315" PESD5V0S1BL315 -2256.42,530.57 r90 top
FB1 "?Ω@100MHz" BEADC1608X75N -2491.54,159.73 r270 top
FB2 "?Ω@100MHz" BEADC1608X75N -2404.76,159.73 r90 top
FID1 "MARK Point" FIDUCIAL -2491.54,778.32 r0 top
FID2 "MARK Point" FIDUCIAL -14.36,240.76 r90 top
FID3 "MARK Point" FIDUCIAL -2491.54,778.32 r180 bottom
FID4 "MARK Point" FIDUCIAL -14.36,240.76 r180 bottom
H1 "M3" M3_NPTH -2528.33,-626.54 r0 top
H2 "M3" M3_NPTH 22.64,994.79 r0 top
H3 "M3" M3_NPTH 22.64,-626.54 r0 top
H4 "M3" M3_NPTH -2528.33,994.79 r0 top
J1 "XT60_2pads" XT60_2pads -2438.57,-51.75 r270 top
J2 "SH1.0-4P" CONN-SMD_4P-P1.00_BX-SH1.0-4PWT -2252.21,1046.23 r180 top
J3 "GH1.25-4P" GH1.25-4P -1887.21,1062.13 r180 top
J4 "GH1.25-5P" GH1.25-5P -893.32,-651.32 r0 top
J5 "GH1.25-6P" GH1.25-6P -2139.54,1051.16 r0 bottom
J6 "GH1.25-5P" GH1.25-5P -2208.81,-648.07 r0 top
J7 "MR30PB-F" "MR30PB-F [Straight] [SMT]" -413.3,-594.31 r180 top
J8 "MR30PB-F" "MR30PB-F [Straight] [SMT]" -1742.99,-594.31 r180 top
J9 "2square_pads" 2pads_square -1186.31,-669.49 r270 top
L1 "3.3uH, 2.2A" WE-MAPI_3020 -31.46,408.15 r180 top
LED1 "Green" LED0603-RD 49.62,770.57 r180 top
NT1 "6mil" NETTIE_6MIL#1 -367.65,290.15 r270 top net-tie
NT2 "6mil" NETTIE_6MIL#1 -554.36,207.33 r270 top net-tie
NT3 "6mil" NETTIE_6MIL#1 -658.94,207.33 r270 top net-tie
NT4 "6mil" NETTIE_6MIL#1 -569.32,207.33 r270 top net-tie
NT5 "6mil" NETTIE_6MIL#1 -674.99,207.33 r270 top net-tie
NT6 "6mil" NETTIE_6MIL#2 -1650.99,-155.6 r90 top net-tie
NT7 "6mil" NETTIE_6MIL#1 -1978.5,207.33 r270 top net-tie
NT8 "6mil" NETTIE_6MIL#1 -2087.99,207.33 r270 top net-tie
NT9 "6mil" NETTIE_6MIL#1 -1991.5,207.33 r270 top net-tie
NT10 "6mil" NETTIE_6MIL#1 -2104.61,207.33 r270 top net-tie
NT11 "6mil" NETTIE_6MIL#1 -1338.47,-450.21 r270 bottom net-tie
Q1 "BSC027N04LSG" NRVTS10100EMFST1G -4.06,-150.11 r90 top
Q2 "BSC027N04LSG" NRVTS10100EMFST1G -331.61,-150.11 r90 top
Q3 "BSC027N04LSG" NRVTS10100EMFST1G -659.17,-150.11 r90 top
Q4 "BSC027N04LSG" NRVTS10100EMFST1G -215.28,-243.75 r270 top
Q5 "BSC027N04LSG" NRVTS10100EMFST1G -540.54,-243.75 r270 top
Q6 "BSC027N04LSG" NRVTS10100EMFST1G -865.79,-243.75 r270 top
Q7 "BSC027N04LSG" NRVTS10100EMFST1G -1331.82,-150.11 r90 top
Q8 "BSC027N04LSG" NRVTS10100EMFST1G -1653.75,-150.11 r90 top
Q9 "BSC027N04LSG" NRVTS10100EMFST1G -1975.68,-150.11 r90 top
Q10 "BSC027N04LSG" NRVTS10100EMFST1G -1541.93,-243.75 r270 top
Q11 "BSC027N04LSG" NRVTS10100EMFST1G -1864.95,-243.75 r270 top
Q12 "BSC027N04LSG" NRVTS10100EMFST1G -2187.98,-243.75 r270 top
Q13 "BSC027N04LSG" NRVTS10100EMFST1G -1001.17,-150.11 r90 top
Q14 "BSC027N04LSG" NRVTS10100EMFST1G -1213.57,-243.75 r270 top
R1 "100kΩ ±1% 62.5mW" WRIS-KSKE_0402 -11.28,687.6 r180 top
R2 "13.7kΩ ±1% 62.5mW" WRIS-KSKE_0402 76.05,687.6 r180 top
R3 "10kΩ ±1% 100mW" R0603 -93.97,770.36 r180 top
R4 "10kΩ ±1% 62.5mW" WRIS-KSKE_0402 -1179.17,70.8 r180 top
R5 "1kΩ ±1% 62.5mW" WRIS-KSKE_0402 -1176.18,401.9 r90 bottom
R6 "5.1kΩ ±1% 62.5mW" WRIS-KSKE_0402 -2185.68,568.32 r180 top
R7 "22Ω ±1% 62.5mW" WRIS-KSKE_0402 -2233.51,784.5 r90 top
R8 "5.1kΩ ±1% 62.5mW" WRIS-KSKE_0402 -2185.68,419.42 r0 top
R9 "22Ω ±1% 62.5mW" WRIS-KSKE_0402 -2288.27,784.5 r270 top
R10 "22Ω ±1% 62.5mW" WRIS-KSKE_0402 -2185.68,519.42 r0 top
R11 "22Ω ±1% 62.5mW" WRIS-KSKE_0402 -2185.68,469.42 r0 top
R12 "3.3kΩ ±1% 62.5mW" WRIS-KSKE_0402 -943.16,-674.93 r270 bottom
R13 "3.3kΩ ±1% 62.5mW" WRIS-KSKE_0402 -890.68,-674.93 r270 bottom
R14 "3.3kΩ ±1% 62.5mW" WRIS-KSKE_0402 -838.2,-674.93 r270 bottom
R15 "3.3kΩ ±1% 62.5mW" WRIS-KSKE_0402 -2262.71,-674.93 r270 bottom
R16 "3.3kΩ ±1% 62.5mW" WRIS-KSKE_0402 -2209.25,-674.93 r270 bottom
R17 "3.3kΩ ±1% 62.5mW" WRIS-KSKE_0402 -2155.8,-674.93 r270 bottom
R18 "47kΩ ±1% 100mW" WRIS-KSKE_0402 -1095.61,928.13 r0 bottom
R19 "22Ω ±1% 62.5mW" WRIS-KSKE_0402 -934.18,1022.13 r270 top
R20 "22Ω ±1% 62.5mW" WRIS-KSKE_0402 -986.18,1022.13 r270 top
R21 "22Ω ±1% 62.5mW" WRIS-KSKE_0402 -1153.37,876.04 r180 bottom
R22 "22Ω ±1% 62.5mW" WRIS-KSKE_0402 -1153.37,826.8 r180 bottom
R23 "3.3kΩ ±1% 62.5mW" WRIS-KSKE_0402 -915.87,401.9 r270 bottom
R24 "22Ω ±1% 100mW" WRIS-KSKE_0402 -200.68,781.53 r270 top
R25 "2.2Ω ±1% 100mW" WRIS-KSKE_0402 -10.32,88.34 r270 top
R26 "2.2Ω ±1% 100mW" WRIS-KSKE_0402 -332.6,88.34 r270 top
R27 "2.2Ω ±1% 100mW" WRIS-KSKE_0402 -642.87,88.34 r270 top
R28 "18kΩ ±1% 100mW" WRIS-KSKE_0402 -253.68,781.53 r90 top
R29 "22Ω ±1% 100mW" WRIS-KSKE_0402 -311.68,781.53 r270 top
R30 "2.2Ω ±1% 100mW" WRIS-KSKE_0402 -280.43,88.34 r270 top
R31 "2.2Ω ±1% 100mW" WRIS-KSKE_0402 -552.98,88.34 r270 top
R32 "2.2Ω ±1% 100mW" WRIS-KSKE_0402 -894.12,88.34 r270 top
R33 "120Ω ±1% 62.5mW" WRIS-KSKE_0402 -535.1,246.67 r90 top
R34 "22Ω ±1% 62.5mW" WRIS-KSKE_0402 -587.47,781.53 r90 top
R35 "500uΩ ±1% 200mW" WRIS-KSKE_2512 -427.46,-272.03 r180 bottom
R36 "500uΩ ±1% 200mW" WRIS-KSKE_2512 -759.88,-270.45 r180 bottom
R37 "22Ω ±1% 62.5mW" WRIS-KSKE_0402 -640.81,781.53 r90 top
R38 "120Ω ±1% 62.5mW" WRIS-KSKE_0402 -640.42,246.67 r90 top
R39 "3.3kΩ ±1% 62.5mW" WRIS-KSKE_0402 -1277.67,401.9 r90 bottom
R40 "22Ω ±1% 100mW" WRIS-KSKE_0402 -1630.54,781.53 r270 top
R41 "2.2Ω ±1% 100mW" WRIS-KSKE_0402 -1318.84,88.34 r90 top
R42 "2.2Ω ±1% 100mW" WRIS-KSKE_0402 -1649.2,88.34 r90 top
R43 "2.2Ω ±1% 100mW" WRIS-KSKE_0402 -1971.5,88.34 r90 top
R44 "18kΩ ±1% 100mW" WRIS-KSKE_0402 -1680.44,781.53 r90 top
R45 "22Ω ±1% 100mW" WRIS-KSKE_0402 -1739.5,781.53 r270 top
R46 "2.2Ω ±1% 100mW" WRIS-KSKE_0402 -1595.66,88.34 r90 top
R47 "2.2Ω ±1% 100mW" WRIS-KSKE_0402 -1918.87,88.34 r90 top
R48 "2.2Ω ±1% 100mW" WRIS-KSKE_0402 -2187.84,88.34 r90 top
R49 "120Ω ±1% 62.5mW" WRIS-KSKE_0402 -1958,246.67 r90 top
R50 "500uΩ ±1% 200mW" WRIS-KSKE_2512 -1752.46,-273.49 r180 bottom
R51 "500uΩ ±1% 200mW" WRIS-KSKE_2512 -2084.28,-272.49 r180 bottom
R52 "22Ω ±1% 62.5mW" WRIS-KSKE_0402 -2011.54,781.53 r90 top
R53 "22Ω ±1% 62.5mW" WRIS-KSKE_0402 -2066.54,781.53 r90 top
R54 "120Ω ±1% 62.5mW" WRIS-KSKE_0402 -2066.24,246.67 r90 top
R55 "3.3kΩ ±1% 62.5mW" WRIS-KSKE_0402 -1021.44,401.9 r90 bottom
R56 "2.2Ω ±1% 100mW" WRIS-KSKE_0402 -987.41,88.34 r90 top
R57 "2.2Ω ±1% 100mW" WRIS-KSKE_0402 -1264.14,88.34 r90 top
R58 "120Ω ±1% 62.5mW" WRIS-KSKE_0402 -1367.63,195.34 r180 top
R59 "500uΩ ±1% 200mW" WRIS-KSKE_2512 -1385.19,-519.2 r90 bottom
R60 "120Ω ±1% 62.5mW" WRIS-KSKE_0402 -1326.69,401.9 r270 bottom
R61 "120Ω ±1% 100mW" R0603 -1679.15,1005.18 r90 bottom
RT1 "NTC_10kΩ ±1% 100mW" WRIS-KSKE_0402 -447.25,70.8 r180 top
RT2 "NTC_10kΩ ±1% 100mW" WRIS-KSKE_0402 -1765.99,70.8 r0 top
RT3 "NTC_10kΩ ±1% 100mW" WRIS-KSKE_0402 -1089.64,70.8 r0 top
U1 "LMR51430YFDDCR" SOT95P280X110-6N 24.31,573.68 r90 top
U2 "ME6217C33M5G" SOT-23-5_L3.0-W1.7-P0.95-LS2.8-BR -656.19,1047.17 r0 bottom
U3 "LP5907MFX-3.3_NOPB" SOT95P280X145-5N -322.2,1047.17 r180 bottom
U4 "STM32F405RGT6" STM-LQFP64_N -1048.57,691.62 r0 top
U5 "DRV8303DCA" SOP50P810X120-49N -436.54,513.3 r270 top
U6 "DRV8303DCA" SOP50P810X120-49N -1861.54,513.3 r270 top
U7 "LM5109" SON80P400X80_HS-9N -873.97,294.4 r270 top
U8 "AD8418" MSOP-8_L3.0-W3.0-P0.65-LS5.0-BL -1416.76,299.11 r90 top
U9 "SN65HVD232D" SOIC127P600X175-8N -1492.7,1007.18 r180 bottom
USB1 "USB-C 16P" USB-C-16P -2447.21,486.55 r270 top
X1 "8MHz ±10ppm_10pF" CRYSTAL_3225 -1478.26,757.04 r90 top

## Footprints (in the part's own frame and the unit in brackets; to place one, negate y for a bottom-side part, rotate by r counter-clockwise, add the part's x,y. Pads: shape width x height; smd on the part's side, far side on the other; paste and mask are expansions set on the pad)
2pads_square [mm]
  rrect50% 3.5x3.5 smd: 1(0,0) 2(0,-5)
  silkscreen extent -2.39,-6.98 2.03,2.03
BEADC1608X75N [mm]
  rect 0.9x1 smd: 1(-0.8,0) 2(0.8,0)
  silkscreen extent 0,-0.3 0,0.3, body extent -0.8,-0.4 0.8,0.4, height 0.75
CAPC3225X270N [mm]
  rect 1.22x2.72 smd: 1(-1.35,0) 2(1.35,0)
  silkscreen extent 0,-1.15 0,1.15, body extent -1.6,-1.25 1.6,1.25, height 2.7
CONN-SMD_4P-P1.00_BX-SH1.0-4PWT [mm]
  rect 0.5x1.7 smd paste+0 mask+0.05: 1(-1.5,1.7) 2(-0.5,1.7) 3(0.5,1.7) 4(1.5,1.7)
  rect 1.2x2.5 smd paste+0 mask+0.05: 5(2.6,-1.7) 6(-2.6,-1.7)
  silkscreen extent -3.08,-3 3.08,2.59, body extent -3.18,-2.92 3.18,2.13, height 3.14
CRYSTAL_3225 [mm] "4P-L3.2-W2.5-BL-2"
  rect 1.4x1.15 smd paste+0 mask+0.051: 1(-1.1,-0.8) 3(1.1,0.8) G(-1.1,0.8) G(1.1,-0.8)
  silkscreen extent -2.54,-1.9 2.29,1.65, body extent -1.6,-1.26 1.6,1.24, height 0.81
DIOM5127X229N [mm]
  rect 2.2x1.55 smd: 1(-2.05,0) 2(2.05,0)
  silkscreen extent -2.83,-1.33 2.55,1.33, body extent -2.55,-1.33 2.55,1.33, height 2.29
FIDUCIAL [mm] "1mm fiducial with 3mm keepout"
  round 1 smd paste-1 mask+0.5: 0(0,0)
  Top Layer keep-out circle w0.025: c0,0 r1.5
GH1.25-4P [mm]
  rect 0.6x1.7 smd mask+0.05: 1(-1.845,1.905) 2(-0.595,1.905) 3(0.655,1.905) 4(1.905,1.905)
  rect 1x2.7 smd mask+0.05: 5(-3.695,-1.296) 6(3.755,-1.296)
  silkscreen extent -3.97,-2.59 4.03,2.39, body extent -4.13,-2.67 4.13,2.19, height 4.26
GH1.25-5P [mm]
  rect 0.6x1.7 smd mask+0.05: 1(-2.5,1.6) 2(-1.25,1.6) 3(0,1.6) 4(1.25,1.6) 5(2.5,1.6)
  rect 1x2.7 smd mask+0.05: 6(-4.35,-1.6) 7(4.35,-1.6)
  silkscreen extent -4.75,-2.7 4.75,2, body extent -4.75,-2.92 4.75,1.94, height 4.26
GH1.25-6P [mm]
  rect 0.6x1.7 smd mask+0.051: 1(-3.125,1.6) 2(-1.875,1.6) 3(-0.625,1.6) 4(0.625,1.6) 5(1.875,1.6) 6(3.125,1.6)
  rect 1x2.7 smd mask+0.051: 7(-4.975,-1.6) 8(4.975,-1.6)
  silkscreen extent -5.46,-2.79 5.46,2, body extent -5.38,-2.92 5.38,1.94, height 4.26
LED0603-RD [mm]
  rect 0.8x0.8 smd paste+0 mask+0.051: 1(0.799,0.003) 2(-0.799,-0.003)
  silkscreen extent -1.49,-0.75 1.39,0.76, body extent -0.81,-0.41 0.81,0.41, height 0.56
M3_NPTH [mm] "Hole without copper"
  round 5 hole 3.2: 1(0,0)
  silkscreen extent -3,-3 3,3
"MR30PB-F [Straight] [SMT]" [mm] "驱动器端"
  rrect50% 2.5x3 smd: 1(3.5,-1.489) 2(0,-1.489) 3(-3.5,-1.489)
  silkscreen extent -5.21,-3.43 5.21,-0.08, body extent -5.94,-1.78 5.94,9.62, height 2.74
MSOP-8_L3.0-W3.0-P0.65-LS5.0-BL [mil]
  oval 14.33x66.61 smd: 1(-38.39,-84.49) 2(-12.79,-84.49) 3(12.8,-84.49) 4(38.39,-84.49) 5(38.39,84.49) 6(12.8,84.49) 7(-12.79,84.49) 8(-38.39,84.49)
  silkscreen extent -69,-90 65,68, body extent -60,-98 58,98, height 39
NETTIE_6MIL#1 [mil]
  round 6 smd paste-78.74 mask+0: 1(0,0) 2(12,0)
  Top Layer region: 0,-3 12,-3 12,3 0,3
NETTIE_6MIL#2 [mil]
  round 6 on Mid2 paste-78.74 mask+0: 1(0,0) 2(12,0)
  Signal region: 0,-3 12,-3 12,3 0,3
NRVTS10100EMFST1G [mm]
  rect 0.75x0.475 smd: D(0,5.779) D(3.81,5.779)
  rect 4.56x2.73 smd: D(1.905,4.179)
  rect 4.56x0.43 smd: D(1.905,1.699)
  rect 5.55x0.91 smd: D(1.905,2.364)
  rect 0.75x1 smd: G(3.81,0.021) S(0,0.021) S(1.27,0.021) S(2.54,0.021)
  silkscreen extent -0.55,-1 4.36,5.85, body extent -0.67,-0.45 4.48,5.71, height 1
PESD5V0S1BL315 [mm]
  rect 0.4x0.7 smd: 1(-0.35,0) 2(0.35,0)
  silkscreen extent -0.85,0 -0.75,0.1, body extent -0.5,-0.3 0.5,0.3, height 0.47
R0603 [mil]
  rect 31.75x34.02 smd mask+2: 1(-29.66,0) 2(29.66,0)
  silkscreen extent -55,-26 55,26, body extent -33,-16 31,16, height 18
SMA_L4.4-W2.6-LS5.0-RD [mm]
  rect 1.8x1.7 smd paste+0 mask+0.051: 1(-2.192,0) 2(2.192,0)
  silkscreen extent -3.11,-1.48 2.73,1.48, body extent -2.6,-1.24 2.6,1.26, height 2.1
SOIC127P600X175-8N [mm] "SOIC, 8-Leads, Body 4.90x3.90mm, Pitch 1.27mm, IPC Medium Density"
  oval 1.45x0.6 smd: 1(-2.725,1.905) 2(-2.725,0.635) 3(-2.725,-0.635) 4(-2.725,-1.905) 5(2.725,-1.905) 6(2.725,-0.635) 7(2.725,0.635) 8(2.725,1.905)
  silkscreen extent -2.85,-2.5 1.6,2.88, body extent -2,-2.5 2,2.5, height 1.75
SON80P400X80_HS-9N [mm] "SON, 8-Leads, Body 4.00x4.00mm, Pitch 0.80mm, Thermal Pad 3.00x2.49mm, IPC Medium Density"
  rect 0.9x0.3 smd mask+0: 1(-1.895,1.2) 2(-1.895,0.4) 3(-1.895,-0.4) 4(-1.895,-1.2) 5(1.895,-1.2) 6(1.895,-0.4) 7(1.895,0.4) 8(1.895,1.2)
  rect 2.49x3 smd paste-1.245 mask+0: 9(0,0)
  silkscreen extent -2.65,-2.2 2.2,2.25, body extent -2.05,-2.05 2.05,2.05, height 0.8
SOP50P810X120-49N [mm]
  rect 1.475x0.3 smd: 1(-3.788,5.75) 2(-3.788,5.25) 3(-3.788,4.75) 4(-3.788,4.25) 5(-3.788,3.75) 6(-3.788,3.25) 7(-3.788,2.75) 8(-3.788,2.25) 9(-3.788,1.75) 10(-3.788,1.25) 11(-3.788,0.75) 12(-3.788,0.25) 13(-3.788,-0.25) 14(-3.788,-0.75) 15(-3.788,-1.25) 16(-3.788,-1.75) 17(-3.788,-2.25) 18(-3.788,-2.75) 19(-3.788,-3.25) 20(-3.788,-3.75) 21(-3.788,-4.25) 22(-3.788,-4.75) 23(-3.788,-5.25) 24(-3.788,-5.75) 25(3.788,-5.75) 26(3.788,-5.25) 27(3.788,-4.75) 28(3.788,-4.25) 29(3.788,-3.75) 30(3.788,-3.25) 31(3.788,-2.75) 32(3.788,-2.25) 33(3.788,-1.75) 34(3.788,-1.25) 35(3.788,-0.75) 36(3.788,-0.25) 37(3.788,0.25) 38(3.788,0.75) 39(3.788,1.25) 40(3.788,1.75) 41(3.788,2.25) 42(3.788,2.75) 43(3.788,3.25) 44(3.788,3.75) 45(3.788,4.25) 46(3.788,4.75) 47(3.788,5.25) 48(3.788,5.75)
  rect 3.48x4.42 smd: 49(0,0)
  silkscreen extent -4.52,6.25 -3.05,6.25, body extent -4.05,-6.25 4.05,6.25, height 1.2
SOT95P280X110-6N [mm]
  rect 1.25x0.6 smd: 1(-1.25,0.95) 2(-1.25,0) 3(-1.25,-0.95) 4(1.25,-0.95) 5(1.25,0) 6(1.25,0.95)
  silkscreen extent -1.88,-1.45 0.28,1.6, body extent -1.4,-1.45 1.4,1.45, height 0.97
SOT95P280X145-5N [mm]
  rect 1.2x0.6 smd: 1(-1.25,0.95) 2(-1.25,0) 3(-1.25,-0.95) 4(1.25,-0.95) 5(1.25,0.95)
  silkscreen extent -1.85,-1.45 0.3,1.5, body extent -1.4,-1.45 1.4,1.45, height 1.2
SOT-23-5_L3.0-W1.7-P0.95-LS2.8-BR [mm]
  rect 1x0.6 smd: 1(1.3,-0.95) 2(1.3,0) 3(1.3,0.95) 4(-1.3,0.95) 5(-1.3,-0.95)
  silkscreen extent -0.9,-1.78 1.65,1.55, body extent -1.45,-1.39 1.45,1.39, height 1.2
STM-LQFP64_N [mm] "Thin QFP, 64-Leads, Body 10x10mm, Pitch 0.5mm, IPC Medium Density"
  oval 1.8x0.3 smd: 1(-5.55,3.75) 2(-5.55,3.25) 3(-5.55,2.75) 4(-5.55,2.25) 5(-5.55,1.75) 6(-5.55,1.25) 7(-5.55,0.75) 8(-5.55,0.25) 9(-5.55,-0.25) 10(-5.55,-0.75) 11(-5.55,-1.25) 12(-5.55,-1.75) 13(-5.55,-2.25) 14(-5.55,-2.75) 15(-5.55,-3.25) 16(-5.55,-3.75) 33(5.55,-3.75) 34(5.55,-3.25) 35(5.55,-2.75) 36(5.55,-2.25) 37(5.55,-1.75) 38(5.55,-1.25) 39(5.55,-0.75) 40(5.55,-0.25) 41(5.55,0.25) 42(5.55,0.75) 43(5.55,1.25) 44(5.55,1.75) 45(5.55,2.25) 46(5.55,2.75) 47(5.55,3.25) 48(5.55,3.75)
  oval 0.3x1.8 smd: 17(-3.75,-5.55) 18(-3.25,-5.55) 19(-2.75,-5.55) 20(-2.25,-5.55) 21(-1.75,-5.55) 22(-1.25,-5.55) 23(-0.75,-5.55) 24(-0.25,-5.55) 25(0.25,-5.55) 26(0.75,-5.55) 27(1.25,-5.55) 28(1.75,-5.55) 29(2.25,-5.55) 30(2.75,-5.55) 31(3.25,-5.55) 32(3.75,-5.55) 49(3.75,5.55) 50(3.25,5.55) 51(2.75,5.55) 52(2.25,5.55) 53(1.75,5.55) 54(1.25,5.55) 55(0.75,5.55) 56(0.25,5.55) 57(-0.25,5.55) 58(-0.75,5.55) 59(-1.25,5.55) 60(-1.75,5.55) 61(-2.25,5.55) 62(-2.75,5.55) 63(-3.25,5.55) 64(-3.75,5.55)
  silkscreen extent -5.67,-4.25 4.25,4.57, body extent -5,-5 5,5, height 1.6
USB-C-16P [mm]
  oval 1.001x2.101 hole 0.599 slot 1.801 at 90 deg paste-2539.97 mask+0.051: 0(-4.321,1.633) 0(4.321,1.633)
  oval 1.001x1.6 hole 0.599 slot 1.199 at 90 deg paste-2539.97 mask+0.051: 0(-4.321,-2.548) 0(4.321,-2.548)
  rect 0.3x1.45 smd: A1(-3.071,2.7) A4(-2.309,2.7) A5(-1.25,2.7) A6(-0.25,2.7) A7(0.25,2.7) A8(1.25,2.7) A9(2.291,2.7) A12(3.079,2.7) B1(3.384,2.7) B4(2.596,2.7) B5(1.75,2.7) B6(0.75,2.7) B7(-0.75,2.7) B8(-1.75,2.7) B9(-2.614,2.7) B12(-3.376,2.7)
  Keep-Out Layer board cut-out: -2.629,1.102 -2.664,1.254 -2.761,1.376 -2.901,1.444 -3.057,1.444 -3.198,1.376 -3.295,1.254 -3.33,1.102 -3.33,1.102 -3.295,0.95 -3.198,0.828 -3.057,0.761 -2.901,0.761 -2.761,0.828 -2.664,0.95 -2.629,1.102
  Keep-Out Layer board cut-out: 3.33,1.102 3.295,1.254 3.198,1.376 3.057,1.444 2.901,1.444 2.761,1.376 2.664,1.254 2.629,1.102 2.629,1.102 2.664,0.95 2.761,0.828 2.901,0.761 3.057,0.761 3.198,0.828 3.295,0.95 3.33,1.102
  silkscreen extent -4.32,-5.08 4.32,3.05, body extent -4.49,-5.02 4.45,2.73, height 3.29
WCAP-CSGP_0402_L1W0.5H0.5 [mm] "Ceramic Capacitors, body 1x0.5mm"
  rect 0.5x0.5 smd: 1(-0.5,0) 2(0.5,0)
  body extent -0.5,-0.25 0.5,0.25, height 0.5
WCAP-CSGP_0603_L1.6W0.8H0.8_Reflow [mm] "Ceramic Capacitors, body 1.6x0.8mm"
  rect 0.8x0.8 smd: 1(-0.75,0) 2(0.75,0)
  body extent -0.8,-0.4 0.8,0.4, height 0.8
WE-MAPI_3020 [mm] "SMT Shielded Power Inductor, body 3x3mm"
  rect 1.3x3.4 smd: 1(-1.05,0) 2(1.05,0)
  Top Layer keep-out region: -0.4,1.7 0.4,1.7 0.4,-1.7 -0.4,-1.7
  body extent -1.5,-1.5 1.5,1.5, height 2
WRIS-KSKE_0402 [mm] "Thick Film Resistors, SMT, body size 1x0.5mm"
  rect 0.4x0.5 smd: 1(-0.45,0) 2(0.45,0)
  body extent -0.5,-0.25 0.5,0.25, height 0.35
WRIS-KSKE_2512 [mm] "Thick Film Resistors, SMT, body size 6.3x3.2mm"
  rect 1x3.2 smd: 1(-3.1,0) 2(3.1,0)
  silkscreen extent -2.25,-1.68 2.25,1.68, body extent -3.15,-1.6 3.15,1.6, height 0.6
XT60_2pads [mm]
  rrect50% 5x5 smd: 1(0,0) 2(7.2,0)
  silkscreen extent -2.79,-3.4 10.03,2.79, body extent -4.31,-18.92 11.59,1.58, height 6.25

## Part data
C1 C2 C3 C4 C5 C6 C20 C21 C22 C23 C24 C25 C26 C27 C28 C29 C30 C31 C32 C33 C34 C35 C36 C37 C38 C39 C41 C42 C43 C45 C46 C47 C48 C50 C51 C52 C53 C54 C56 C57 C58 C60 C61 C62 C63 C65 C66 C67 C68 C69 C70 C71 C72: library part Cap, "Capacitor", LatestRevisionDate=17-Jul-2002, LatestRevisionNote="Re-released for DXP Platform.", PackageDescription="Radial Cap, Thru-Hole; 2 Leads; 0.3 in Pin Spacing", PackageReference=RAD-0.3, Published=8-Jun-2000, Publisher="Altium Limited"
C7 C8 C9 C10 C11 C12 C13 C14 C15 C16 C17 C18 C19: library part CL32A226KAJNNNE, "Capacitor", Manufacturer_Name=SAMSUNG, Mouser Part Number=187-CL32A226KAJNNNE, Arrow Part Number=CL32A226KAJNNNE, Arrow Price/Stock=https://www.arrow.com/en/products/cl32a226kajnnne/samsung-electro-mechanics?region=nac, Datasheet Link=https://www.arrow.com/en/products/cl32a226kajnnne/samsung-electro-mechanics, Height=2.7mm, Manufacturer_Part_Number=CL32A226KAJNNNE, Mouser Price/Stock=https://www.mouser.co.uk/ProductDetail/Samsung-Electro-Mechanics/CL32A226KAJNNNE?qs=hqM3L16%252BxlenZa7Di5a%252Buw%3D%3D
C40 C44 C49 C55 C59 C64: library part Cap, "CL05A225KO5NQNC", LatestRevisionDate=17-Jul-2002, LatestRevisionNote="Re-released for DXP Platform.", PackageDescription="Radial Cap, Thru-Hole; 2 Leads; 0.3 in Pin Spacing", PackageReference=RAD-0.3, Published=8-Jun-2000, Publisher="Altium Limited"
D1: "Diode", Arrow Part Number=SMAJ30A-E3/61, Manufacturer_Name=Vishay, Mouser Part Number=625-SMAJ30A-E3, Arrow Price/Stock=https://www.arrow.com/en/products/smaj30a-e361/vishay?region=nac, Datasheet Link=http://www.vishay.com/docs/88390/smaj50a.pdf, Height=2.29mm, Manufacturer_Part_Number=SMAJ30A-E3/61, Mouser Price/Stock=https://www.mouser.co.uk/ProductDetail/Vishay-General-Semiconductor/SMAJ30A-E3-61?qs=M2MvrwIlMUxWAZKdikEp%2Fw%3D%3D
D2 D3: library part Diode_Schottky, "直流反向耐压(Vr):40V;平均整流电流(Io):3A;正向压降(Vf):500mV@3A;", Average Rectified Current (Io)=3A, Forward Voltage (Vf@If)=500mV@3A, JLCPCB Part Class=扩展库, LCSC Part Name="40V 3A 500mV@3A", Manufacturer=DIODES(美台), Reverse Voltage (Vr)=40V, Add into BOM=yes, Convert to PCB=yes, Datasheet=https://atta.szlcsc.com/upload/public/pdf/source/20171023/C134454_15087453575121052549.pdf, Device=B340A-13-F, Manufacturer Part=B340A-13-F, Name=B340A-13-F, Supplier=LCSC, Supplier Footprint=SMA(DO-214AC), Supplier Part=C85098, Symbol=B340A-13-F
D4 D5: "Diode ESD (Bi-directional)", Manufacturer_Name=Nexperia, Mouser Part Number=771-PESD5V0F1BL315, Arrow Part Number=PESD5V0F1BL,315, Arrow Price/Stock=https://www.arrow.com/en/products/pesd5v0f1bl315/nexperia?region=nac, Datasheet Link=https://assets.nexperia.com/documents/data-sheet/PESD5V0F1BL.pdf, Height=0mm, Manufacturer_Part_Number=PESD5V0F1BL,315, Mouser Price/Stock=https://www.mouser.co.uk/ProductDetail/Nexperia/PESD5V0F1BL315?qs=GcY6OjH1zdnPNi4NEDIXZQ%3D%3D
FB1 FB2: library part "Ferrite Bead", "MPZ1608S601ATA00", Current Rating=2A, DC Resistance=250mΩ, Impedance @ Frequency=600Ω@100MHz, JLCPCB Part Class="Extended Part", LCSC Part Name="600Ω@100MHz ±25%", Manufacturer=FH(风华), Manufacturer Part=CBW321609U601T, Tolerance=±25%, Add into BOM=yes, Circuits=1, Convert to PCB=yes, Datasheet=https://atta.szlcsc.com/upload/public/pdf/source/20160606/1465200211209.pdf, Device=CBW321609U601T, Name=CBW321609U601T, Supplier=LCSC, Supplier Footprint=SMD, Supplier Part=C73732, Symbol=CBW321609U601T
FID1 FID2 FID3 FID4: library part FIDUCIAL, "1mm Fiducial with 2mm soldermask, 3mm keepout"
H1 H2 H3 H4: library part NPTH, "Hole without copper"
J2: "CONN-SMD_4P-P1.25_532610571-2", JLCPCB Part Class="Extended Part", LCSC Part Name=GH1.25-5P立贴编带加盖, Manufacturer=BOOMELE(博穆精密), Manufacturer Part=GH1.25-5PLTPZ, Add into BOM=yes, Convert to PCB=yes, Datasheet=https://atta.szlcsc.com/upload/public/pdf/source/20211125/08A09A4909F58AF780B71FE423A00F7E.pdf, Device=GH1.25-5PLTPZ, Name=GH1.25-5PLTPZ, Supplier=LCSC, Supplier Footprint=-, Supplier Part=C2829263, Symbol=GH1.25-5PLTPZ
J3 J4 J5 J6: JLCPCB Part Class="Extended Part", LCSC Part Name=GH1.25-5P立贴编带加盖, Manufacturer=BOOMELE(博穆精密), Manufacturer Part=GH1.25-5PLTPZ, Add into BOM=yes, Convert to PCB=yes, Datasheet=https://atta.szlcsc.com/upload/public/pdf/source/20211125/08A09A4909F58AF780B71FE423A00F7E.pdf, Device=GH1.25-5PLTPZ, Name=GH1.25-5PLTPZ, Supplier=LCSC, Supplier Footprint=-, Supplier Part=C2829263, Symbol=GH1.25-5PLTPZ
J7 J8: library part "MR30PB-F [Straight] [SMT]", "驱动器端"
L1: library part 74438336033, "WE-MAPI, size 3020, 3.3uH, 2.2A, 114mOhm", Case/Size Code=3020, DC Resistance=99mOhm, DC Resistance Max=114mOhm, Inductance=3.3uH, Manufacturer="Wurth Elektronik", Operating Temperature Max=125°C, Operating Temperature Min=-40°C, Rated Current=2.2A, Saturation Current=4.25A, Self Resonant Frequency=39MHz, ComponentLink1Description="Website Link", ComponentLink1URL=https://www.we-online.com/redexpert/article/74438336033?ad, ComponentLink2Description="Datasheet Link", ComponentLink2URL=https://www.we-online.com/redexpert/spec/74438336033?ad, Height=2mm, Length=3mm, Manufacturer Part Number=74438336033, Match Code=WE-MAPI, Mount="Surface Mount", Packaging="Tape and Reel", Width=3mm
LED1: library part LED, "发光颜色:", Emitted Color=红灯, JLCPCB Part Class="Extended Part", Manufacturer=EVERLIGHT(亿光), Manufacturer Part=17-21SURC/S530-A2/TR8, Add into BOM=yes, Convert to PCB=yes, Datasheet=https://atta.szlcsc.com/upload/public/pdf/source/20170918/C131244_1505726880590976254.pdf, Device=17-21SURC/S530-A2/TR8, LCSC Part Name=红灯, Name=17-21SURC/S530-A2/TR8, Supplier=LCSC, Supplier Footprint=0805, Supplier Part=C131244, Symbol=17-21SURC/S530-A2/TR8
NT1 NT2 NT3 NT4 NT5 NT6 NT7 NT8 NT9 NT10 NT11: library part NETTIE
Q1 Q2 Q3 Q4 Q5 Q6 Q7 Q8 Q9 Q10 Q11 Q12 Q13 Q14: library part MOSFET-N, "MOSFET – Power, Single, / N-Channel, PG-TDSON-8 / SuperSO8 5x6 / 40 V, 139 A", Current - Continuous Drain (Id) @ 25°C="13A (Ta), 93A (Tc)", Drain to Source Voltage (Vdss)=30V, Drive Voltage (Max Rds On,  Min Rds On)="4.5V, 10V", Input Capacitance (Ciss) (Max) @ Vds="4850pF @ 15V", Manufacturer="ON Semiconductor", Manufacturer Part Number=NTMFS4935NT1G, Operating Temperature="-55°C ~ 150°C (TJ)", Package / Case="8-PowerTDFN, 5 Leads", Power Dissipation (Max)="930mW (Ta), 48W (Tc)", Supplier Device Package="5-DFN (5x6) (8-SOFL)", Supplier Part Number 1=NTMFS4935NT1GOSCT-ND, Category="Discrete Semiconductor Products", ComponentLink1Description=http://www.onsemi.com/pub_link/Collateral/NTMFS4935N-D.PDF, ComponentLink1URL=http://www.onsemi.com/pub_link/Collateral/NTMFS4935N-D.PDF, FET Feature=-, FET Type=N-Channel, Gate Charge (Qg) (Max) @ Vgs="49.4nC @ 10V", Mounting Type="Surface Mount", Packaging="Cut Tape (CT)", Part Status=Active, Pricing 1="1=0.61, 10=0.541, 100=0.4145, 500=0.3277 (USD)", Rds On (Max) @ Id, Vgs="3.2 mOhm @ 30A, 10V", RoHS="RoHS Compliant", Stock 1=932, Supplier 1=Digi-Key, Technology="MOSFET (Metal Oxide)", Vgs (Max)=±20V, Vgs(th) (Max) @ Id="2.2V @ 250µA"
R1 R2 R3 R4 R5 R6 R7 R8 R9 R18 R19 R20 R21 R22 R23 R24 R25 R26 R27 R28 R29 R30 R31 R32 R33 R34 R35 R36 R37 R38 R39 R40 R41 R42 R43 R44 R45 R46 R47 R48 R49 R50 R51 R52 R53 R54 R55 R56 R57 R58 R59 R60 R61: library part Res, "Resistor", LatestRevisionDate=17-Jul-2002, LatestRevisionNote="Re-released for DXP Platform.", PackageDescription="Axial Device, Thru-Hole; 2 Leads; 0.3 in Pin Spacing", PackageReference=AXIAL-0.3, Published=8-Jun-2000, Publisher="Altium Limited"
R10 R11: library part Res, "0402WGF220JTCE", LatestRevisionDate=17-Jul-2002, LatestRevisionNote="Re-released for DXP Platform.", PackageDescription="Axial Device, Thru-Hole; 2 Leads; 0.3 in Pin Spacing", PackageReference=AXIAL-0.3, Published=8-Jun-2000, Publisher="Altium Limited"
R12 R13 R14 R15 R16 R17: library part Res, LatestRevisionDate=17-Jul-2002, LatestRevisionNote="Re-released for DXP Platform.", PackageDescription="Axial Device, Thru-Hole; 2 Leads; 0.3 in Pin Spacing", PackageReference=AXIAL-0.3, Published=8-Jun-2000, Publisher="Altium Limited"
RT1 RT2 RT3: library part "TEMP RES", "THERMISTOR 10K OHM NTC 0402 SMD"
U1: "Integrated Circuit", Manufacturer_Name="Texas Instruments", Mouser Part Number=595-LMR51430YFDDCR, Arrow Part Number=LMR51430YFDDCR, Arrow Price/Stock=null?utm_currency=USD&region=nac, Datasheet Link=https://www.ti.com/lit/gpn/LMR51430, Height=1.1mm, Manufacturer_Part_Number=LMR51430YFDDCR, Mouser Price/Stock=https://www.mouser.co.uk/ProductDetail/Texas-Instruments/LMR51430YFDDCR?qs=vvQtp7zwQdObTljc3WTMYQ%3D%3D
U2: Dropout Voltage=180mV@(300mA), JLCPCB Part Class="Extended Part", Manufacturer=MICRONE(南京微盟), Maximum Input Voltage=7V, Output Current=800mA, Output Voltage=3.3V, Power Supply Rejection Ratio (PSRR)=65dB@(1kHz), Quiescent Current (Ground Current)=-, Add into BOM=yes, Convert to PCB=yes, Datasheet=https://atta.szlcsc.com/upload/public/pdf/source/20190910/C427602_D4B9162A2E9D9EF57C60010DFDECEF37.pdf, Device=ME6217C33M5G, LCSC Part Name=ME6217C33M5G, Manufacturer Part=ME6217C33M5G, Name=ME6217C33M5G, Number of Outputs=1, Output Polarity=正, Output Type=固定, Supplier=LCSC, Supplier Footprint=SOT-23-5, Supplier Part=C427602, Symbol=ME6217C33M5G
U3: "Integrated Circuit", Arrow Part Number=LP5907MFX-3.3/NOPB, Manufacturer_Name="Texas Instruments", Mouser Part Number=595-LP5907MFX-3.3NPB, Arrow Price/Stock=https://www.arrow.com/en/products/lp5907mfx-3.3nopb/texas-instruments?utm_currency=USD&region=nac, Datasheet Link=https://datasheet.datasheetarchive.com/originals/distributors/Datasheets-SFU2/DSASFU100037200.pdf, Height=1.45mm, Manufacturer_Part_Number=LP5907MFX-3.3/NOPB, Mouser Price/Stock=https://www.mouser.co.uk/ProductDetail/Texas-Instruments/LP5907MFX-3.3-NOPB?qs=biyDIajrTn6NhrJCoL%2FdSQ%3D%3D
U4: "ARM Cortex-M4 32-bit MCU+FPU, 210 DMIPS, 1024 kB Flash, 192 kB Internal RAM, 51 I/Os, 64-pin LQFP, -40 to 85 degC, Tray", I/Os (High Current)=51, Manufacturer=STMicroelectronics, Operating Frequency(F) (Processor speed) (MHz)=168, Supplier Part Number 1=497-11767-ND, Supply Voltage(Vcc) max (V)=3.6, Supply Voltage(Vcc) min (V)=1.8, ComponentLink1Description="Manufacturer URL", ComponentLink1URL=http://www.st.com/web/en/home.html, ComponentLink2Description=Datasheet, ComponentLink2URL=http://www.st.com/st-web-ui/static/active/en/resource/technical/document/datasheet/DM00037051.pdf, ComponentLink3Description="Package Specification", ComponentLink3URL=http://www.st.com/st-web-ui/static/active/en/resource/technical/document/datasheet/DM00037051.pdf, Core="ARM Cortex-M4", D/A Converter=2x12-bit, DatasheetVersion="Rev. 4", FLASH Size (Prog) (kB)=1024, Internal RAM Size (kB)=192, Mounting Technology="Surface Mount", PackageDescription="64-Pin Low Profile Quad Flat Package, 10 x 10 mm Body, 0.5 mm Pitch", PackageReference=LQFP64, PackageVersion="Rev. 4, 06/2013", Packing=Tray, PartNumber=STM32F405RGT6, Supplier 1=Digi-Key, Supplier 2=Farnell, Supplier 3=Newark, Supplier 4=Mouser, Supplier Part Number 2=2064363, Supplier Part Number 3=73T2329, Supplier Part Number 4=511-STM32F405RGT6
U5 U6: "Integrated Circuit", Manufacturer_Name="Texas Instruments", Mouser Part Number=595-DRV8303DCA, Arrow Part Number=DRV8303DCA, Arrow Price/Stock=https://www.arrow.com/en/products/drv8303dca/texas-instruments, Datasheet Link=https://componentsearchengine.com/Datasheets/2/DRV8303DCA.pdf, Height=1.2mm, Manufacturer_Part_Number=DRV8303DCA, Mouser Price/Stock=https://www.mouser.co.uk/ProductDetail/Texas-Instruments/DRV8303DCA?qs=igp4D3uu33KLowzNFy6WPA%3D%3D
U7: "DRIVER, MOSFET, HALF BRIDGE, WSON-8, 1A", Supplier Part Number 1=2400642RL, Supplier 1=Farnell, Supplier 2=Farnell, Supplier 3=Farnell, Supplier Part Number 2=2400642, Supplier Part Number 3=2382850
U8: library part AD8418WBRZ, "ANALOG DEVICES Current Sense Amplifier, Bidirectional, 1, 130 µA, NSOIC"
U9: Manufacturer="Texas Instruments", Operating Temperature="-40°C ~ 85°C", Package / Case="8-SOIC (0.154\", 3.90mm Width)", Supplier Device Package=8-SOIC, Supplier Part Number 1=296-26344-2-ND, Voltage - Supply="3 V ~ 3.6 V", Category="Integrated Circuits (ICs)", ComponentLink1Description=http://www.ti.com/lit/ds/symlink/sn65hvd230.pdf, ComponentLink1URL=http://www.ti.com/lit/ds/symlink/sn65hvd230.pdf, Data Rate=1Mbps, Duplex=Half, Mounting Type="Surface Mount", Number of Drivers/Receivers=1/1, Packaging="Tape & Reel (TR)", Part Status=Active, Pricing 1="2500=0.84375 (USD)", Pricing 2="1=2.05, 10=1.842, 100=1.4809, 500=1.21668, 1000=1.00811 (USD)", Protocol=CAN, RoHS="RoHS Compliant", Stock=5000, Supplier 1=Digi-Key, Supplier 2=Digi-Key, Supplier Part Number 2=296-26344-1-ND, Type=Transceiver
X1: library part CRYSTAL, "Crystal 8MHz ±10ppm 10pF 200 Ohm -10°C ~ 60°C Surface Mount 4-SMD, No Lead (DFN, LCC)", Frequency Stability=±10ppm, Load Capacitance=10pF, Manufacturer="Abracon LLC", Manufacturer Part Number=ABM3B-8.000MHZ-10-1-U-T, Operating Mode=Fundamental, Operating Temperature="-10°C ~ 60°C", Package / Case="4-SMD, No Lead", Ratings=-, Supplier Part Number 1=535-9721-1-ND, Category="Crystals, Oscillators, Resonators", ComponentLink1Description=http://www.abracon.com/Resonators/abm3b.pdf, ComponentLink1URL=http://www.abracon.com/Resonators/abm3b.pdf, Frequency Tolerance=±10ppm, Height - Seated (Max)="0.043\" (1.10mm)", Mounting Type="Surface Mount", Packaging="Cut Tape (CT)", Part Status=Active, Pricing 1="1=0.69, 10=0.578, 50=0.5198, 100=0.462, 500=0.4389 (USD)", Pricing 2="1000=0.336, 3000=0.315, 5000=0.3045, 10000=0.294 (USD)", RoHS="RoHS Compliant", Size / Dimension="0.197\" L x 0.126\" W (5.00mm x 3.20mm)", Stock=35437, Supplier 1=Digi-Key, Supplier 2=Digi-Key, Supplier Part Number 2=535-9721-2-ND, Type="MHz Crystal"

## Via types
v1: diameter 20, hole 12, Top Layer to Bottom Layer, tented both sides, 616 vias
v2: diameter 18, hole 10, Top Layer to Bottom Layer, tented both sides, 296 vias
v3: diameter 18, hole 12, Top Layer to Bottom Layer, tented both sides, 18 vias
v4: diameter 20, hole 10, Top Layer to Bottom Layer, tented both sides, 18 vias

## Nets (pads, with @x,y where several pads share a name; then routed paths per layer and width w, separated by ;. In a path a pad name is that pad's centre, name@x,y a point inside that pad or via, vN(x,y) a via of type N, cw(c..) or ccw(c..) an arc to the next point about the centre after c; other vN are vias at no path point)
AGND: C22.1 C24.1 C36.1 C37.1 C44.2 C47.1 C48.1 C49.1 C52.1 C59.2 C62.1 C63.1 C64.1 C67.1 C71.1 C72.1 FB2.2 R5.1 R23.2 R39.1 R55.1 U4.12 U5.24 U6.24 U8.2 U8.3 | length 844.4
  Top Layer w10: C64.1@-2121.54,803.3 v1(-2121.54,828.97) ; v1(-2097.92,712.25) -2097.92,710.49 -2088.83,701.39 -2088.83,663.34 U6.24@-2087.92,662.44 ; C59.2@-1956.54,803.3 -1956.03,803.82 -1956.03,828.71 v1(-1955.51,829.22) ; U8.2@-1332.27,286.32 -1333.1,287.15 -1365,287.15 -1376.04,298.19 v2(-1377.25,298.19) -1375.72,299.72 -1371.78,299.72 -1359.58,311.91 U8.3@-1332.27,311.91 ; v2(-1322.14,643.49) -1322.14,641.33 -1317,636.19 -1317,635.81 -1304.26,623.07 -1267.42,623.07 U4.12@-1267.08,622.72 ; C49.1@-694.14,803.3 v2(-694.14,825.48) ; v1(-663.01,622.86) v1(-663.01,622.86) U5.24@-662.92,662.44 U5.24@-662.92,662.44 ; C44.2@-534.14,803.3 -533.65,803.8 -533.65,824.98 v2(-533.15,825.48)
  Bottom Layer w6: C62.1@-1132.2,629.84 C62.1@-1130.09,627.73
  Bottom Layer w10: v2(-1322.14,643.49) -1319.98,643.49 -1316.8,646.67 -1296.33,646.67 C36.1@-1295.35,647.65 ; v2(-1277.67,362.27) R39.1@-1277.67,384.86 ; v2(-1227.67,362.27) -1227.22,362.72 -1227.22,383.82 C52.1@-1226.77,384.27 ; v2(-1176.18,362.27) R5.1@-1176.18,384.86 ; C63.1@-1132.94,673.29 -1127.62,678.61 -1107.36,678.61 -1105.52,680.44 v2(-1103.36,680.44) ; C47.1@-1130.8,772.82 C47.1@-1129.14,774.49 v2(-1100.29,774.49) ; C48.1@-1130.68,726.8 v2(-1101.84,726.8) ; C62.1@-1130.09,627.73 v2(-1111.28,627.73) ; C22.1@-1123.78,384.27 -1123.07,383.56 -1123.07,362.98 v2(-1122.36,362.27) ; C67.1@-1073.43,384.27 -1073.37,384.21 -1073.37,362.33 v2(-1073.31,362.27) ; C72.1@-1068.43,495.65 -1067.45,495.65 -1061.62,501.48 -1061.62,512.21 -1052.51,521.32 v1(-1052.51,524.03) ; R55.1@-1021.44,384.86 -1021.09,384.5 -1021.09,362.62 v2(-1020.73,362.27) ; v2(-968.01,362.27) v2(-968.01,362.27) -967.95,384.21 -967.6,384.56 -916.16,384.56 R23.2@-915.87,384.86 ; v4(-457.46,994.79) -455.55,996.7 -455.55,1009.5 -453.6,1011.45 -453.6,1013.42 -442.85,1024.17 -438.91,1024.17 -416.27,1001.53 -416.27,996.7 v4(-414.36,994.79)
  Bottom Layer w15: C71.1@-1398.22,296.75 -1397.36,297.61 -1377.83,297.61 v2(-1377.25,298.19)
  other v1: -2373.11,191.8 -2422.58,221.49 -2389.2,221.49
  other v2: -942.27,383.04
AUX_H: U4.30 U7.2 | length 169.6
  Top Layer w6: U4.30@-940.3,473.11 -941.42,472 -941.42,438.61 -942.86,437.16 -942.86,428.44 -933.97,419.54 -883.87,419.54 -868.43,404.11 -868.43,391.02 -858.22,380.81 U7.2@-858.22,369
AUX_I: C72.2 R60.1 U4.21 | length 339.9
  Top Layer w6: U4.21@-1117.47,473.11 -1117.24,473.35 -1117.24,512.35 -1111.83,517.75 v2(-1111.83,521)
  Bottom Layer w6: R60.1@-1326.69,418.94 -1325.76,419.86 -1325.76,435.56 -1317.35,443.97 -1158.49,443.97 -1106.82,495.65 C72.2@-1105.83,495.65 -1111.28,501.1 -1111.28,520.45 v2(-1111.83,521)
AUX_L: U4.29 U7.3 | length 170.3
  Top Layer w6: U4.29@-959.99,473.11 -959.99,442.01 -955.14,437.16 -955.14,423.43 -939.26,407.54 -888.97,407.54 -880.53,399.1 -880.53,390.01 -889.72,380.81 U7.3@-889.72,369
AUX_TEMP: C67.2 R55.2 RT3.2 U4.24 | length 481.3
  Top Layer w6: v2(-1072.98,166.13) -1072.98,71.18 RT3.2@-1072.6,70.8 ; U4.24@-1058.41,473.11 -1057.69,472.38 -1057.69,432.83 -1048.99,424.14 v2(-1048.99,421.43)
  Bottom Layer w6: v2(-1072.98,166.13) -1098.86,192.01 -1098.86,396.24 -1082.24,412.86 -1081.26,412.86 -1073.43,420.69 -1073.43,421.67 -1073.31,421.55 -1049.36,421.55 v2@-1049.24,421.67 ; v2(-1048.99,421.43) -1023.94,421.43 R55.2@-1021.44,418.94
CAN_MCU_N: U4.61 U9.4 | length 628.6
  Top Layer w6: U4.61@-1137.16,910.12 -1137.16,962.18 v2(-1135,964.34)
  Bottom Layer w6: U9.4@-1385.42,932.18 -1402.15,932.18 -1422.96,952.99 -1422.96,990.4 -1431.43,998.86 -1444.85,998.86 -1454.09,989.62 -1454.09,947.88 -1412.35,906.14 -1342.59,906.15 -1241.53,1007.21 -1154.48,1007.21 -1140.3,993.03 -1140.3,972.89 -1135,967.58 v2(-1135,964.34)
CAN_MCU_P: U4.62 U9.1 | length 652.1
  Top Layer w6: v2(-1159,964.34) -1156.84,962.18 U4.62@-1156.84,910.12
  Bottom Layer w6: -1407.37,894.13 -1417.33,894.13 -1420.85,897.64 -1466.23,943.03 -1466.23,995.55 -1448.57,1013.21 -1429.99,1013.21 -1422.96,1020.24 -1422.96,1022.27 -1422.96,1061.37 -1402.15,1082.18 U9.1@-1385.42,1082.18 ; -1407.37,894.13 -1336.07,894.13 -1235.89,994.32 -1160.24,994.32 -1152.48,986.56 -1152.48,973.85 -1159,967.33 v2(-1159,964.34)
CAN_N: J3.2 R61.1 U9.6 | length 393.2
  Top Layer w6: J3.2@-1863.78,987.13 -1863.78,965.48 -1845.33,947.02 -1845.33,934.3 -1826.82,915.78 -1762.11,915.78 -1744.23,933.66 -1744.23,953.02 -1738.38,958.87 v2(-1738.38,962.12)
  Bottom Layer w6: v2(-1738.38,962.12) -1738.38,965.37 -1744.08,971.07 -1744.08,986.55 -1731.8,998.83 -1703.59,998.83 -1680.28,975.52 R61.1@-1679.15,975.52 ; R61.1@-1679.15,982.18 U9.6@-1599.99,982.18